# Allegro board ChipSee-AM3359.brd
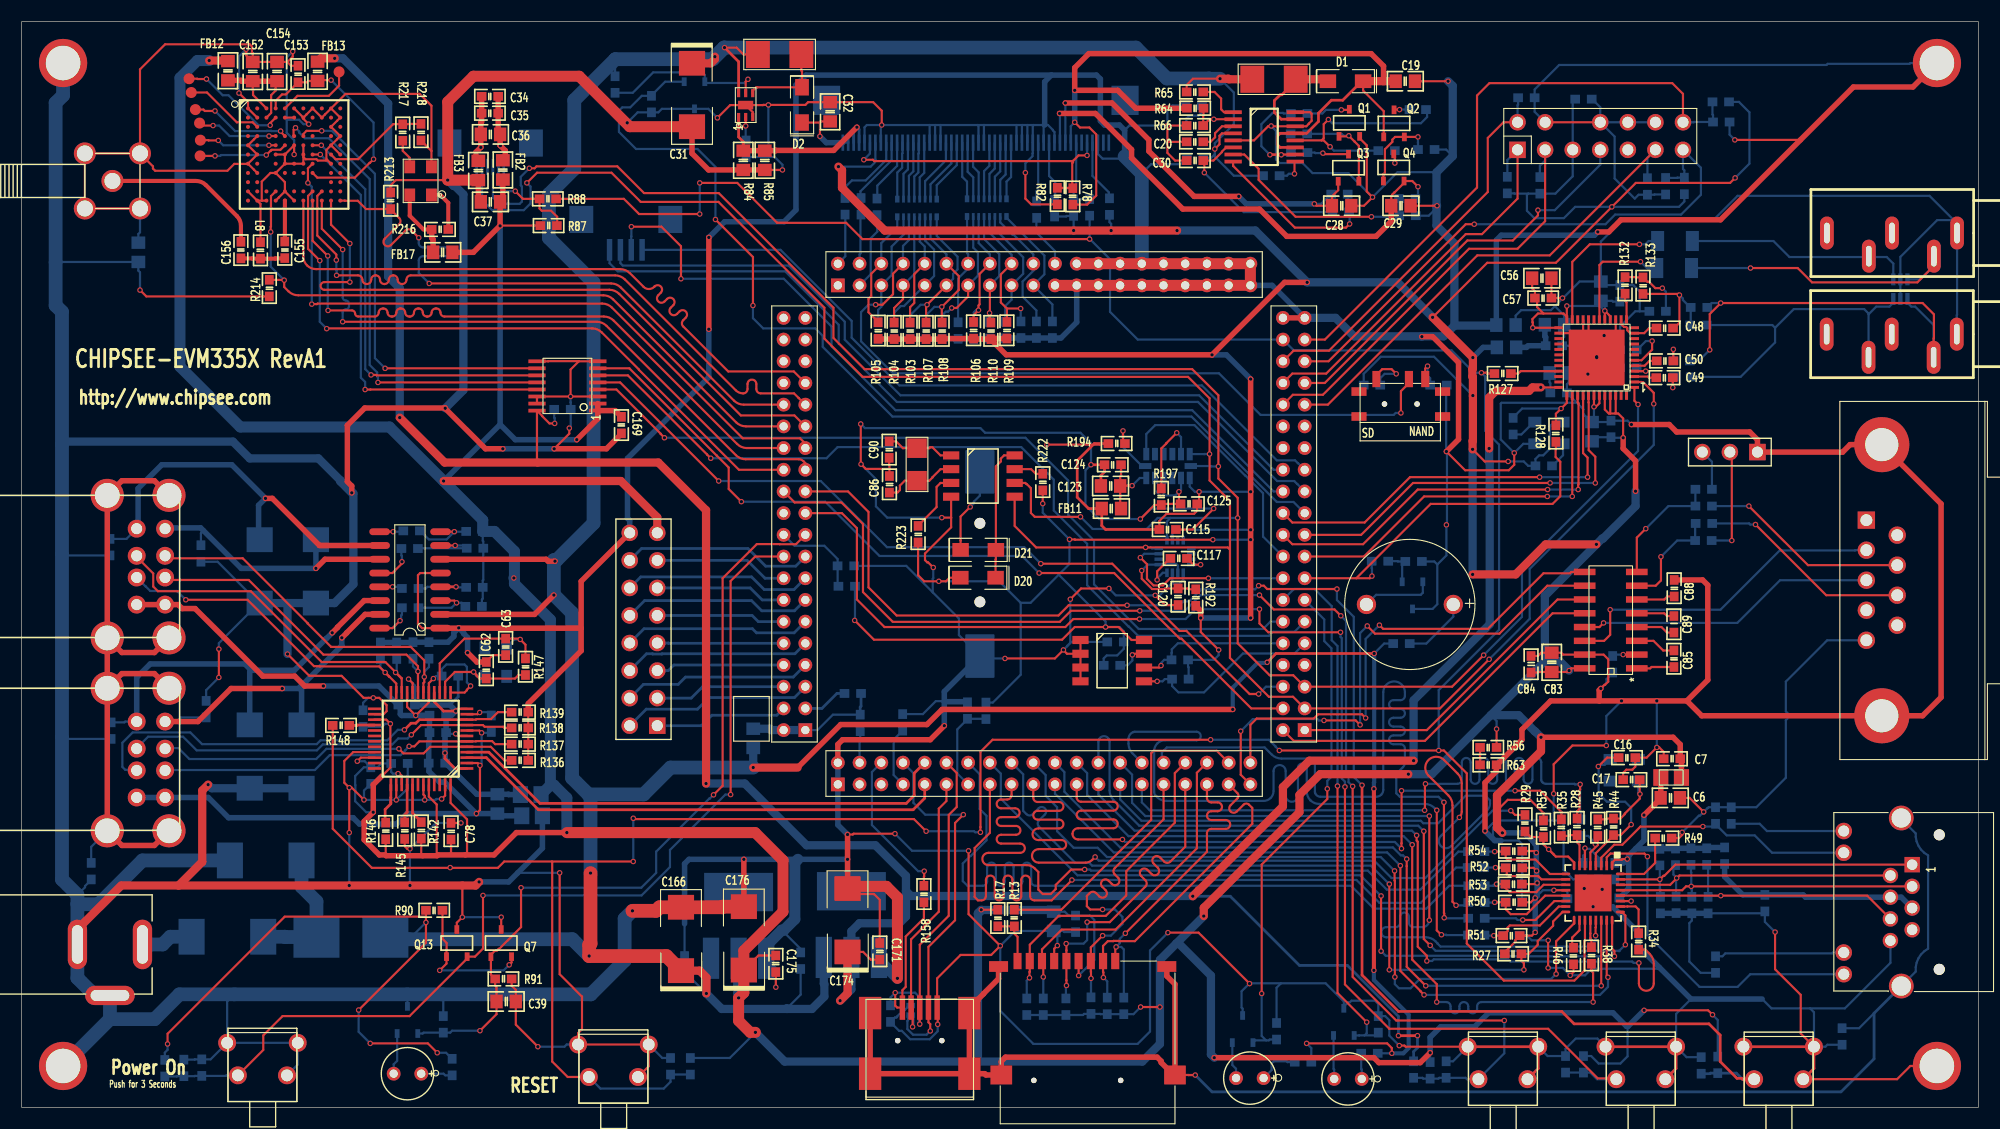
[diagram p0: board, top side]
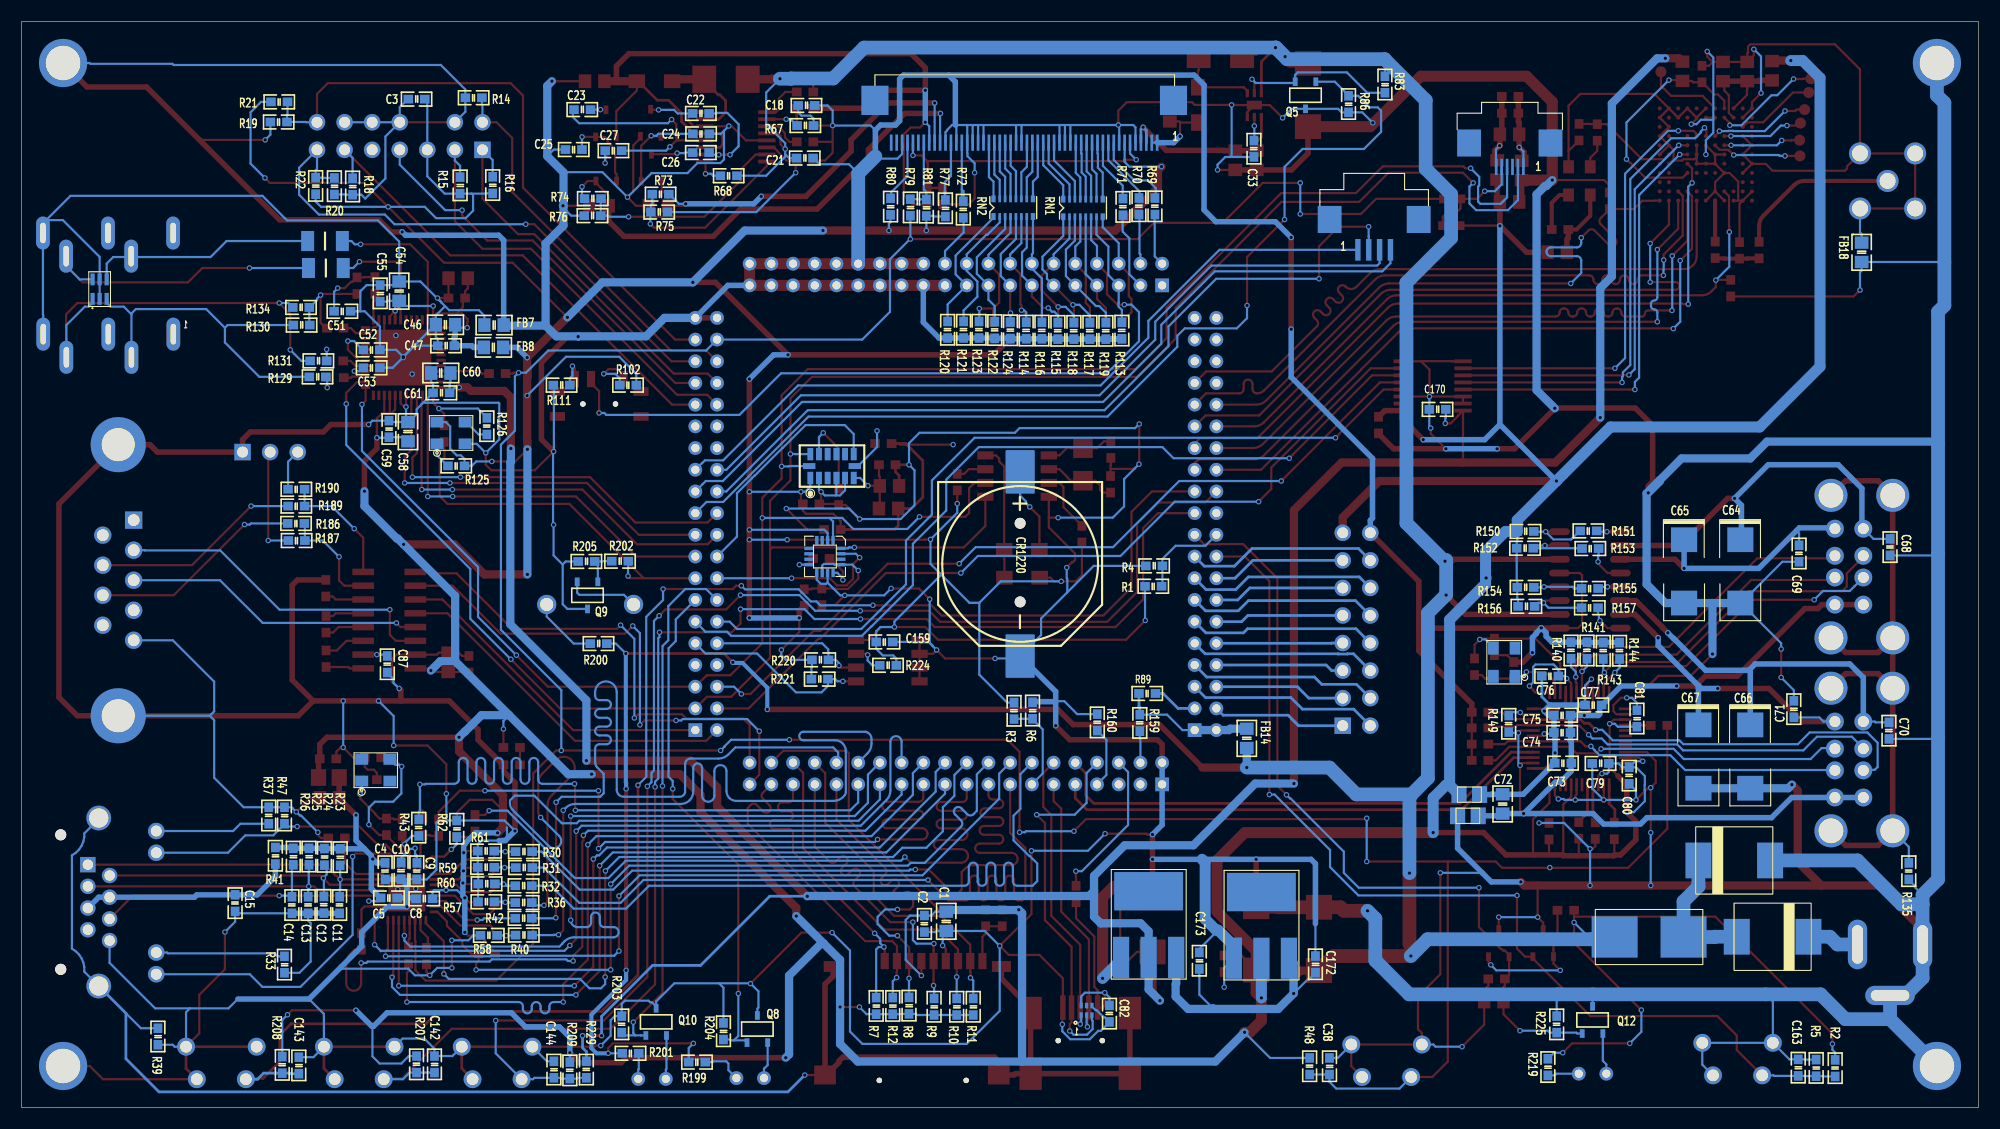
[diagram p1: board, bottom side, seen from below]

Outline 180.24 x 100.08 mm; copper layers: TOP, BOTTOM. Coordinates in mm from the lower left corner of the outline.
Outline path: 0,100.08 0,0 180.24,0 180.24,100.08 0,100.08

## Design rules (mm)
net group POWER: nets DGND VDD_3V3
net group CLK: nets LCD_DCLK
net group GMII1: nets GMII1_COL GMII1_CRS GMII1_MDIO_CLK GMII1_MDIO_DATA GMII1_REFCLK GMII1_RXCLK GMII1_RXD0 GMII1_RXD1 GMII1_RXD2 GMII1_RXD3 GMII1_RXDV GMII1_RXERR GMII1_TXCLK GMII1_TXD0 GMII1_TXD1 GMII1_TXD2 GMII1_TXD3 GMII1_TXEN
net group H_JTAG_POINT69: nets N12176376 TDI TDO TMS TRSTN
net group MG5_H_JTAG: nets TCK
net group MMC0: nets MMC0_CLK MMC0_CMD MMC0_D0 MMC0_D1 MMC0_D2 MMC0_D3 MMC0_SDCD
net group WIFI: nets GPMC_AD9 GPMC_AD10 GPMC_AD11 GPMC_AD12 GPMC_AD13 GPMC_AD14 GPMC_AD15 GPMC_CLK GPMC_CSN3

## Placement (name value [footprint] x y rotation side)
ANT1  SMA  [SMA-CHIPSEE]  10.9 87.93 180 top
BT1  CoinBattery3.1V  [BAT]  88.27 50.09 90 bottom
C1  10uF  [0805]  95.07 17.14 270 bottom
C2  0.1uF  [0603]  97.08 16.92 270 bottom
C3  1UF  [0603]  143.87 92.94 0 bottom
C4  0.1uF  [0603]  146.76 21.77 270 bottom
C5  0.1uF  [0603]  146.41 19.3 180 bottom
C6  10uF  [0805]  151.87 28.52 0 top
C7  0.1uF  [0603]  152.02 32.13 180 top
C8  0.1uF  [0603]  143.15 19.23 0 bottom
C9  2.2nF  [0603]  143.84 21.77 270 bottom
C10  1uF  [0603]  145.29 21.79 270 bottom
C11  18pF,DNI  [0603]  150.95 18.64 270 bottom
C12  18pF,DNI  [0603]  152.4 18.67 270 bottom
C13  18pF,DNI  [0603]  153.85 18.64 270 bottom
C14  18pF,DNI  [0603]  155.35 18.64 270 bottom
C15  0.1uF  [0603]  160.58 18.82 270 bottom
C16  30pF  [0603]  147.88 32.23 0 top
C17  30pF  [0603]  148.29 30.2 180 top
C18  0.1uF  [0603]  107.95 92.35 0 bottom
C19  10uF  [0805]  127.46 94.59 180 top
C20  2.2nF  [0603]  108.08 89 0 top
C21  0.1uF  [0603]  108.1 87.5 0 bottom
C22  0.1uF  [0603]  117.68 91.62 0 bottom
C23  0.1uF  [0603]  128.6 91.97 0 bottom
C24  0.47uF  [0603]  117.65 89.74 180 bottom
C25  0.47uF  [0603]  129.39 88.29 180 bottom
C26  0.22uF  [0603]  117.68 88.01 0 bottom
C27  0.22uF  [0603]  125.73 88.19 180 bottom
C28  10uF  [0805]  121.59 83.11 0 top
C29  10uF  [0805]  127.05 83.11 0 top
C30  0.22uF  [0603]  108.08 87.27 180 top
C31  100uF  [MC6032P]  61.75 93.32 270 top
C32  10uF  [0805]  74.47 91.77 90 top
C33  0.22uF  [0603]  66.73 88.37 270 bottom
C34  30pF  [0603]  43.13 93.19 0 top
C35  0.1uF  [0603]  43.13 91.64 0 top
C36  10uF  [0805]  43.18 89.69 180 top
C37  10uF  [0805]  43.18 83.46 180 top
C38  0.1uF  [0603]  59.77 3.78 90 bottom
C39  1uF  [0805]  44.63 9.75 0 top
C44  47uF  [C1206]  152.3 79.86 180 bottom
C45  47uF  [C1206]  152.22 77.37 180 bottom
C46  10uF  [0805]  141.2 72.14 0 bottom
C47  0.1uF  [0603]  141.15 70.21 0 bottom
C48  0.1uF  [0603]  151.36 71.83 0 top
C49  0.1uF  [0603]  151.33 67.26 0 top
C50  0.1uF  [0603]  151.38 68.81 0 top
C51  0.1uF  [0603]  150.7 73.38 180 bottom
C52  0.1uF  [0603]  148.01 69.82 180 bottom
C53  0.01uF  [0603]  148.01 68.17 180 bottom
C54  10uF  [0805]  145.47 75.23 90 bottom
C55  0.1uF  [0603]  147.22 75.03 90 bottom
C56  10uF  [0805]  140.03 76.43 0 top
C57  0.1uF  [0603]  140.16 74.6 0 top
C58  10uF  [0805]  144.65 62.28 90 bottom
C59  0.1uF  [0603]  146.41 62.53 90 bottom
C60  10uF  [0805]  141.63 67.69 0 bottom
C61  0.1uF  [0603]  141.58 65.86 0 bottom
C62  25pF  [0603]  42.8 40.28 270 top
C63  25pF  [0603]  44.58 42.44 90 top
C64  100uF  [MC6032P]  21.92 49.4 270 bottom
C65  100uF  [MC6032P]  27.1 49.4 270 bottom
C66  100uF  [MC6032P]  21.01 32.33 270 bottom
C67  100uF  [MC6032P]  25.78 32.33 270 bottom
C68  0.1uF  [0603]  8.13 51.64 270 bottom
C69  0.1uF  [0603]  16.51 51.05 270 bottom
C70  0.1uF  [0603]  8.23 34.72 270 bottom
C71  0.1uF  [0603]  16.99 36.7 90 bottom
C72  10uF  [0805]  43.81 27.97 270 bottom
C73  0.1uF  [0603]  38.25 31.72 180 bottom
C74  0.1uF  [0603]  38.33 34.54 180 bottom
C75  0.1uF  [0603]  38.33 36.14 180 bottom
C76  0.1uF  [0603]  39.45 39.75 180 bottom
C77  0.1uF  [0603]  35.46 37.08 180 bottom
C78  0.1uF  [0603]  39.55 25.45 90 top
C79  0.1uF  [0603]  34.8 31.7 0 bottom
C80  0.1uF  [0603]  32.16 30.58 270 bottom
C81  0.1uF  [0603]  31.45 35.84 90 bottom
C82  0.01uF  [0603]  80.04 8.64 270 bottom
C83  10uF  [0805]  140.94 41.02 90 top
C84  0.01uF  [0603]  139.04 40.84 90 top
C85  0.1uF  [0603]  152.2 41.35 90 top
C86  25pF  [0603]  79.93 57.43 90 top
C87  0.1uF  [0603]  146.56 40.84 270 bottom
C88  0.1uF  [0603]  152.22 47.85 90 top
C89  0.1uF  [0603]  152.2 44.53 90 top
C90  25pF  [0603]  79.91 60.63 90 top
C115  0.01uF  [0603]  105.56 53.26 0 top
C117  0.01uF  [0603]  106.58 50.6 180 top
C120  10uF  [0603]  106.53 47.07 270 top
C123  10uF  [0805]  100.3 57.28 0 top
C124  0.01uF  [0603]  100.51 59.23 0 top
C125  0.01uF  [0603]  107.52 55.63 180 top
C142  0.01uF  [0603]  142.21 3.96 90 bottom
C143  0.01uF  [0603]  154.71 3.86 90 bottom
C144  0.01uF  [0603]  131.22 3.48 90 bottom
C152  10uF  [0805]  21.29 95.48 90 top
C153  1uF  [0603]  25.45 95.25 90 top
C154  2.2uF  [0805]  23.52 95.48 90 top
C155  10pF  [0603]  24.23 79.04 90 top
C156  10pF  [0603]  20.19 79.02 270 top
C159  0.1uf,16V  [0603]  100.76 42.9 180 bottom
C163  0.1uF  [0603]  16.59 3.66 90 bottom
C166  100uF  [MC6032P]  60.73 15.52 90 top
C169  0.01uF  [0603]  55.24 62.89 270 top
C170  0.01uF  [0603]  49.81 64.34 0 bottom
C171  0.1uF  [0603]  79.04 14.38 90 top
C172  0.1uF  [0603]  61.06 13.18 90 bottom
C173  0.1uF  [0603]  71.76 13.51 90 bottom
C174  100uF  [MC6032P]  76.07 17.25 90 top
C175  0.1uF  [0603]  69.47 13.23 270 top
C176  100uF  [MC6032P]  66.52 15.57 90 top
D1  1N5819  [MD3216]  121.95 94.59 0 top
D2  1N5819  [MD3216]  71.88 92.41 270 top
D14  Green LED  [LED-DIP]  111.86 2.69 0 top
D15  Green LED  [LED-DIP]  120.9 2.62 0 top
D16  1N5819  [SMCJ15CA]  18.95 15.72 0 bottom
D17  -  [SMCJ15CA]  22.48 22.76 180 bottom
D18  Green LED  [LED-DIP]  34.26 3.1 0 top
D20  -  [MD3216]  88.09 48.82 0 top
D21  -  [MD3216]  88.11 51.38 0 top
F1  Fuse 4A  [SMDFUSEBLK]  30.33 15.7 0 bottom
FB1  FERRITE  [SM-7351-IND-0805]  151.94 30.4 180 top
FB2  FERRITE  [0805]  44.32 86.41 270 top
FB3  FERRITE  [0805]  42.06 86.36 270 top
FB7  FERRITE  [0805]  136.73 72.11 180 bottom
FB8  FERRITE  [0805]  136.78 70.05 0 bottom
FB9  FERRITE  [SM-7351-IND-0805]  46.89 28.83 180 bottom
FB10  FERRITE  [SM-7351-IND-0805]  47.02 26.87 180 bottom
FB11  FERRITE  [0805]  100.38 55.19 180 top
FB12  FERRITE  [0805]  19 95.55 270 top
FB13  FERRITE  [0805]  27.25 95.5 270 top
FB14  FERRITE  [0805]  67.39 34.01 90 bottom
FB17  FERRITE  [0805]  38.79 78.82 180 top
FB18  FERRITE  [0805]  10.74 78.82 90 bottom
L1  10uH,1A  [L22UH]  113.36 94.77 0 top
L2  10uH,1A  [L22UH]  67.82 97.05 0 top
L8  NL  [0603]  22 78.99 270 top
MTG1  MHOLE  [MOUNTHOLE_3MM_CHIPSEE]  3.81 96.27 0 top
MTG2  MHOLE  [MOUNTHOLE_3MM_CHIPSEE]  176.43 96.27 0 top
MTG3  MHOLE  [MOUNTHOLE_3MM_CHIPSEE]  176.43 3.81 0 top
MTG4  MHOLE  [MOUNTHOLE_3MM_CHIPSEE]  3.81 3.81 0 top
P1  CONN PLUG 20x2  [IDC2X20]  72.19 34.77 90 top
P2  CONN PLUG 20x2  [IDC2X20]  75.18 29.77 0 top
P3  CONN PLUG 20x2  [IDC2X20]  118.19 34.77 90 top
P4  CONN PLUG 20x2  [IDC2X20]  75.18 75.77 0 top
P5  SCHA5B0200  [SD-MICRO-CHIPSEE]  100.74 3.48 90 top
P6  HDR 2x7  [JUMP2X7-6040-K6]  137.8 88.27 90 top
P7  WE_7499010211A  [RJ45-CHIPSEE]  172.64 23.37 90 top
P8  AT070TN92  [FPC50]  105.64 88.93 180 bottom
P9  Res Touch(1mm)  [FPC4]  57.15 79.04 180 bottom
P11  Cap Touch  [FPC6]  44.91 86.69 180 bottom
P14  3.5mm SJ3524  [AUDIO-CHIPSEE-2]  178.28 80.59 0 top
P15  3.5mm SJ3524  [AUDIO-CHIPSEE-2]  178.26 71.27 0 top
P16  USB-A Conn.  [USB_STACKED2]  13.21 35.56 270 top
P17  USB-A Conn.  [USB_STACKED2]  13.21 53.34 270 top
P18  USB_MicroAB  [USB-MINI-SMT-CHIPSEE]  82.73 9.19 0 top
P19  RS232  [DB9M-CHIPSEE]  169.93 43.1 270 top
P20  RS232-3  [IDC_100MIL_1X3]  159.89 60.4 180 top
P23  CON16A  [IDC_100MIL_2X8]  58.55 35.18 90 top
P27  PJ-200A  [CONN3-PWR-CHIPSEE]  11.13 15.01 180 top
Q1  BAT54S  [SOT23-CHIPSEE]  122.3 90.75 90 top
Q2  BAT54S  [SOT23-CHIPSEE]  126.42 90.7 90 top
Q3  BAT54S  [SOT23-CHIPSEE]  122.22 86.61 90 top
Q4  BAT54S  [SOT23-CHIPSEE]  126.39 86.64 90 top
Q5  MOSFET N  [SOT23-CHIPSEE]  61.98 93.29 270 bottom
Q7  MOSFET N  [SOT23-CHIPSEE]  44.17 15.14 90 top
Q8  MOSFET N  [SOT23-CHIPSEE]  112.47 7.21 90 bottom
Q9  MOSFET N  [SOT23-CHIPSEE]  128.12 47.19 270 bottom
Q10  MOSFET N  [SOT23-CHIPSEE]  121.79 7.87 90 bottom
Q12  MOSFET N  [SOT23-CHIPSEE]  35.53 8.05 90 bottom
Q13  MOSFET N  [SOT23-CHIPSEE]  40.08 15.14 90 top
R1  10K,1%,DNI  [0603]  76 48.03 180 bottom
R2  10K,1%,DNI  [0603]  13.18 3.61 270 bottom
R3  10K,1%  [0603]  88.82 36.55 270 bottom
R4  0R  [0603]  75.92 49.91 0 bottom
R5  0R,1%,DNI  [0603]  14.94 3.63 90 bottom
R6  10K,1%,DNI  [0603]  87.12 36.58 90 bottom
R7  10K,1%  [0603]  101.52 9.35 90 bottom
R8  10K,1%  [0603]  98.5 9.37 90 bottom
R9  10K,1%  [0603]  96.19 9.27 90 bottom
R10  10K,1%  [0603]  94.11 9.27 90 bottom
R11  10K,1%  [0603]  92.58 9.27 90 bottom
R12  10K,1%  [0603]  100 9.35 90 bottom
R13  0R  [0603]  91.44 17.45 270 top
R14  10K,1%,DNI  [0603]  138.61 93.07 180 bottom
R15  10K,1%,DNI  [0603]  139.85 84.99 90 bottom
R16  10K,1%,DNI  [0603]  136.86 85.01 90 bottom
R17  10K,1%  [0603]  89.92 17.45 90 top
R18  10K,1%,DNI  [0603]  149.76 84.89 90 bottom
R19  10K,1%,DNI  [0603]  156.57 90.83 180 bottom
R20  10K,1%,DNI  [0603]  151.43 84.91 90 bottom
R21  10K,1%  [0603]  156.51 92.68 180 bottom
R22  10K,1%  [0603]  153.16 84.94 90 bottom
R23  49.9R,1%  [0603]  150.9 23.06 90 bottom
R24  49.9R,1%  [0603]  152.35 23.09 90 bottom
R25  49.9R,1%  [0603]  153.77 23.11 90 bottom
R26  49.9R,1%  [0603]  155.22 23.11 90 bottom
R27  1.5K,5%  [0603]  137.39 14.15 0 top
R28  0R,DNI  [0603]  143.28 25.86 270 top
R29  100R,1%  [0603]  138.48 26.19 270 top
R30  100R,1%  [0603]  133.98 23.57 0 bottom
R31  100R,1%  [0603]  133.96 22.1 0 bottom
R32  100R,1%  [0603]  134.01 20.42 0 bottom
R33  510R,1%  [0603]  156.03 13.16 90 bottom
R34  100R,1%  [0603]  148.95 15.29 90 top
R35  100R,1%  [0603]  141.83 25.78 270 top
R36  100R,1%  [0603]  134.01 18.87 0 bottom
R37  510R,1%  [0603]  157.48 26.9 270 bottom
R38  100R,1%  [0603]  144.6 14 90 top
R39  0R  [0603]  167.69 6.53 90 bottom
R40  100R,1%  [0603]  133.98 15.88 0 bottom
R41  0R  [0603]  156.87 23.19 90 bottom
R42  100R,1%  [0603]  134.01 17.42 0 bottom
R43  0R,DNI  [0603]  143.66 25.78 270 bottom
R44  1M  [0603]  146.63 25.86 90 top
R45  0R  [0603]  145.19 25.78 270 top
R46  10K,1%  [0603]  142.95 13.94 270 top
R47  10K,1%  [0603]  156.03 26.9 90 bottom
R48  10K,1%,DNI  [0603]  61.59 3.78 270 bottom
R49  12.1K,1%  [0603]  151.23 24.82 0 top
R50  10K,1%,DNI  [0603]  137.46 18.9 180 top
R51  10K,1%  [0603]  137.24 15.82 0 top
R52  10K,1%  [0603]  137.46 22.07 0 top
R53  10K,1%  [0603]  137.44 20.57 0 top
R54  10K,1%,DNI  [0603]  137.46 23.62 0 top
R55  10K,1%,DNI  [0603]  140.18 25.68 90 top
R56  10K,1%,DNI  [0603]  135.1 33.17 0 top
R57  10K,1%  [0603]  137.44 18.95 0 bottom
R58  10K,1%,DNI  [0603]  137.21 15.85 0 bottom
R59  10K,1%,DNI  [0603]  137.46 22.12 0 bottom
R60  10K,1%,DNI  [0603]  137.41 20.6 0 bottom
R61  10K,1%  [0603]  137.46 23.62 0 bottom
R62  10K,1%  [0603]  140.16 25.68 90 bottom
R63  10K,1%  [0603]  135.1 31.57 0 top
R64  4.99K,1%  [0603]  108.1 92.1 0 top
R65  100K,1%  [0603]  108.08 93.6 0 top
R66  680R,1%  [0603]  108.08 90.5 0 top
R67  10K,1%  [0603]  108.05 90.5 0 bottom
R68  10K,1%  [0603]  115.11 85.88 180 bottom
R69  22R,1%  [0603]  75.84 83.06 270 bottom
R70  22R,1%  [0603]  77.32 83.06 270 bottom
R71  22R,1%  [0603]  78.79 83.01 270 bottom
R72  22R,1%  [0603]  93.5 82.75 270 bottom
R73  5.6K,1%  [0603]  121.39 84.18 180 bottom
R74  24K,1%  [0603]  127.64 83.77 0 bottom
R75  1K,1%  [0603]  121.51 82.52 0 bottom
R76  2K,1%  [0603]  127.66 82.19 0 bottom
R77  5.6K,1%  [0603]  95.15 82.88 90 bottom
R78  24K,1%  [0603]  96.82 83.97 270 top
R79  0R,DNI  [0603]  98.37 82.96 90 bottom
R80  5.6K,1%  [0603]  100.2 83.03 90 bottom
R81  5.6K,1%  [0603]  96.9 82.93 90 bottom
R82  15K,1%  [0603]  95.4 84 90 top
R83  5.6K,1%  [0603]  54.66 94.28 90 bottom
R84  2.2R,1%  [0805]  66.47 87.3 270 top
R85  2.2R,1%  [0805]  68.45 87.3 270 top
R86  5.6K,1%  [0603]  58.01 92.48 90 bottom
R87  5.6K,1%  [0603]  48.54 81.28 180 top
R88  0R  [0603]  48.46 83.74 180 top
R89  0R  [0603]  76.56 38.15 180 bottom
R90  10K,1%,DNI  [0603]  38 18.16 0 top
R91  100K,1%  [0603]  44.37 11.84 180 top
R102  100K,1%  [0603]  124.38 66.57 180 bottom
R103  100K,1%  [0603]  81.84 71.58 90 top
R104  100K,1%  [0603]  80.37 71.58 90 top
R105  100K,1%  [0603]  78.89 71.6 90 top
R106  100K,1%,DNI  [0603]  87.68 71.63 90 top
R107  100K,1%,DNI  [0603]  83.31 71.58 90 top
R108  100K,1%,DNI  [0603]  84.79 71.58 90 top
R109  100K,1%  [0603]  90.75 71.63 90 top
R110  100K,1%,DNI  [0603]  89.28 71.58 90 top
R111  100K,1%  [0603]  130.51 66.57 0 bottom
R113  100K,1%  [0603]  78.89 71.6 270 bottom
R114  100K,1%  [0603]  87.71 71.6 270 bottom
R115  100K,1%  [0603]  84.79 71.58 270 bottom
R116  100K,1%  [0603]  86.26 71.6 270 bottom
R117  100K,1%  [0603]  81.84 71.58 270 bottom
R118  100K,1%  [0603]  83.31 71.58 270 bottom
R119  100K,1%  [0603]  80.37 71.58 270 bottom
R120  100K,1%  [0603]  94.95 71.68 270 bottom
R121  100K,1%  [0603]  93.47 71.68 270 bottom
R122  100K,1%  [0603]  90.6 71.65 270 bottom
R123  100K,1%,DNI  [0603]  92.05 71.68 270 bottom
R124  100K,1%  [0603]  89.15 71.63 270 bottom
R125  0R,DNI  [0603]  140.21 59.13 180 bottom
R126  0R  [0603]  137.39 62.79 270 bottom
R127  0R  [0603]  136.42 67.64 180 top
R128  0R,DNI  [0603]  141.33 62.1 270 top
R129  0R,DNI  [0603]  152.98 67.34 0 bottom
R130  0R  [0603]  154.46 72.11 0 bottom
R131  0R,DNI  [0603]  152.91 68.81 0 bottom
R132  2.2K  [0603]  147.7 75.77 270 top
R133  330R  [0603]  149.35 75.74 90 top
R134  0R  [0603]  154.51 73.74 0 bottom
R135  0R  [0603]  6.4 21.77 270 bottom
R136  15K,1%  [0603]  45.9 31.98 180 top
R137  15K,1%  [0603]  45.9 33.48 180 top
R138  15K,1%  [0603]  45.9 34.98 180 top
R139  15K,1%  [0603]  45.9 36.42 180 top
R140  15K,1%  [0603]  37.52 42.11 270 bottom
R141  15K,1%  [0603]  36.04 42.11 270 bottom
R142  10K,1%  [0603]  36.8 25.53 90 top
R143  15K,1%  [0603]  34.54 42.09 270 bottom
R144  15K,1%  [0603]  33.05 42.09 270 bottom
R145  10K,1%  [0603]  35.28 25.5 90 top
R146  10K,1%  [0603]  33.53 25.48 90 top
R147  1M  [0603]  46.41 40.61 90 top
R148  0R  [0603]  29.41 35.2 180 top
R149  680R,1%  [0603]  43.26 35.36 270 bottom
R150  15K,1%  [0603]  41.71 53.09 0 bottom
R151  0R  [0603]  35.92 53.14 180 bottom
R152  15K,1%  [0603]  41.76 51.54 0 bottom
R153  0R  [0603]  35.74 51.51 180 bottom
R154  15K,1%  [0603]  41.71 47.93 0 bottom
R155  0R  [0603]  35.79 47.83 180 bottom
R156  15K,1%  [0603]  41.63 46.18 0 bottom
R157  0R  [0603]  35.79 46.05 180 bottom
R158  0R  [0603]  83.11 19.66 90 top
R159  0R  [0603]  77.24 35.43 270 bottom
R160  15K,1%  [0603]  81.15 35.48 270 bottom
R186  0R,DNI  [0603]  154.97 53.82 180 bottom
R187  0R  [0603]  154.91 52.25 180 bottom
R189  0R,DNI  [0603]  154.94 55.42 180 bottom
R190  0R  [0603]  154.94 56.97 180 bottom
R192  0R,DNI  [0603]  108.15 46.99 90 top
R194  10K,1%  [0603]  100.86 61.19 180 top
R197  10K,1%  [0603]  104.98 56.29 270 top
R199  510R,1%  [0603]  118.03 4.17 180 bottom
R200  510R,1%  [0603]  127.1 42.75 0 bottom
R201  510R,1%  [0603]  124.16 4.98 180 bottom
R202  0R  [0603]  125.12 50.34 0 bottom
R203  510R,1%  [0603]  124.97 7.65 270 bottom
R204  100K,1%  [0603]  115.6 7.01 90 bottom
R205  100K,1%  [0603]  128.22 50.32 0 bottom
R207  100K,1%  [0603]  143.87 3.96 270 bottom
R208  100K,1%  [0603]  156.24 3.91 270 bottom
R209  100K,1%,DNI  [0603]  129.74 3.4 270 bottom
R213  3.3K,1%  [0603]  33.99 83.57 270 top
R214  3.3K,1%  [0603]  22.81 75.51 90 top
R216  0R  [0603]  38.53 80.92 180 top
R217  10K,1%  [0603]  35.1 89.87 270 top
R218  12K,1%  [0603]  36.78 89.89 90 top
R219  510R,1%  [0603]  39.65 3.71 90 bottom
R220  10K  [0603]  106.68 41.25 0 bottom
R221  10K  [0603]  106.73 39.47 0 bottom
R222  10K,1%  [0603]  94.06 57.63 90 top
R223  10K,1%  [0603]  82.58 52.83 90 top
R224  10K,1%,DNI  [0603]  100.43 40.74 0 bottom
R225  100K,1%  [0603]  38.84 7.65 270 bottom
R229  100K,1%,DNI  [0603]  128.22 3.48 270 bottom
RN1  22R,8*0402  [RPAK16-10X25-2HV]  82.47 82.91 180 bottom
RN2  22R,8*0402  [RPAK16-10X25-2HV]  88.9 82.93 180 bottom
SW1  SW KEY-SPDT  [SWITCH-CHIPSEE]  124.79 67.13 0 top
SW2  B3SL  [SW4-PUSH-CHIPSEE]  152.4 5.59 180 top
SW3  B3SL  [SW4-PUSH-CHIPSEE]  165.1 5.59 180 top
SW4  B3SL  [SW4-PUSH-CHIPSEE]  139.7 5.59 180 top
SW5  B3SL  [SW4-PUSH-CHIPSEE]  25.43 5.94 180 top
SW6  B3SL  [SW4-PUSH-CHIPSEE]  57.76 5.79 180 top
TP3  -  [TP_SMD1MMCIRCLE]  15.62 93.55 0 top
TP4  -  [TP_SMD1MMCIRCLE]  16.38 90.73 0 top
TP5  -  [TP_SMD1MMCIRCLE]  16.46 89.15 0 top
TP6  -  [TP_SMD1MMCIRCLE]  16 91.97 0 top
TP7  -  [TP_SMD1MMCIRCLE]  16.43 87.71 0 top
TP8  -  [TP_SMD1MMCIRCLE]  29.24 95.45 0 top
TP9  -  [TP_SMD1MMCIRCLE]  15.42 94.82 0 top
U1  LAN8710A  [QFN32_5X5MM_EP3P3MM]  144.75 19.76 180 top
U2  -  [AAT1118]  114.45 89.46 0 top
U3  -  [TPS61165]  66.04 91.29 90 top
U5  TLV320AIC3106  [VQFN48_RGZ]  145.08 69.11 180 top
U6  SMF05CT1G  [SC70-6]  173.71 74.52 180 bottom
U7  -  [GL850A]  36.75 33.99 180 top
U8  TPS2054BD  [SO16-25X75]  35.76 48.62 90 top
U9  TPD4S012  [U_6_DRY]  82.14 8.94 180 bottom
U10  MAX3232E  [U_16_D]  146.38 44.91 90 top
U11  CAT24C256W  [SOP8]  100.46 41.17 0 top
U16  SN74AVC4T245  [U_16_PW]  50.27 66.5 90 top
U17  -  [HMC5883]  106.25 50.77 270 bottom
U19  -  [ADXL345]  107.59 58.01 90 bottom
U21  BEEF  [BUZZER-CHIPSEE]  131.88 46.35 180 top
U25  WG7310-00  [WG7310_00]  25.1 87.83 0 top
U29  AMS1117-1.8  [AMS1117]  78.97 13.82 180 bottom
U30  AMS1117-3.3  [AMS1117]  68.58 13.74 180 bottom
U31  PCF8563  [SOP8]  88.54 58.19 0 top
Y1  25MHz  [CRYSTAL3225]  148.92 30.07 180 bottom
Y2  12MHz,ACTIVE  [CRYSTAL3225]  141.99 61.16 180 bottom
Y3  12MHz  [CRYSTAL3225]  42.67 39.73 90 bottom
Y4  32.768KHz,ACTIVE  [CRYSTAL3225]  37.74 84.1 90 top
Y5  32.768KHz  [Y3512]  82.47 57.76 90 top

## Library data of the parts
ANT1 = SMA
BT1 = Battery_coin3V: Tolerance: RichardLC; User Part Number: pn
C1 = CAP_10uF_Y5V_10V_10%_0805
C2 C4 C5 C7 C8 C18-C30 C32-C37 C159 C171-C173 C175 = CAP_0.1uF_X7R_16V_10% 0402
C3 C38 C39 = 111-1002271_0: tolerance: 10%
C6 = CAP_4.7uF_X5R_6.3V_10%_0603
C9 = 470pF/5%/50V/C0G/0603_0
C10 = CAP_1.0UF_X5R_10V_10%_0402
C11-C14 C62 C63 = CAP_0402_100pF_COG_50V
C15 C68-C81 = CAP_0402_0.1uf_X5R_10V
C16 C17 = CAP_30PF_COG_50V_5%_0402
C31 C174 C176 = CAPACITOR POL
C44 C45 = 47uFCapacitor16V20%1206
C46 C54 C56 C58 C60 C83 C120 = 10uFCapacitor16V10%0805
C47 C49 C50 C55 C57 C59 C61 C85 C87-C89 C163 = 0.1uFCapacitor16V10%0402
C48 C51-C53 C82 C84 C115 C117 C123-C125 C142-C144 C169 C170 = 0.01uFCapacitor16V10%0402
C64-C67 = CAP_293D_120UF_6.3V: tolerance: 10%
C86 C90 = 25pFCapacitor100V5%0603
C152-C156 = CAPACITOR NON-POL
C166 = 100uFCapacitor16V20%ElectroPoly
D1 D2 D16 D20 D21 = DIODE
D14 D15 = LED_LTST-C150GKT
D17 = Diode_SMCJ15CA
D18 = LED_Green
F1 = Fuse_4A
FB1-FB3 = FER_180_200_0
FB7-FB11 = FerBead_180ohm200mA
FB12-FB14 FB17 FB18 = FER_MMZ1608R301A
L1 L2 = INDUCTOR
L8 = INDUCTOR_3
MTG1-MTG4 = MHOLE
P1-P4 = CONN PLUG 20x2_0
P5 = microSD_CONN_0
P6 = HDR_2x7_.1x.1: User Part Number: X; Tolerance: X
P7 = CONN_RJ45_MAG_WE_0
P8 = AT070TN92
P9 = 4 HEADER
P11 = CON6
P14 P15 = Conn_1.5mm_SJ3524SMT
P16 P17 = CONN_54819-0578_8: User Part Number: PART#; Tolerance: TOL
P18 = Conn_MicroUSBAB_0
P19 = Conn_DSUB9M_TH
P20 = CON3
P23 = CON16A
P27 = Power_Jack: Tolerance: X; User Part Number: X
Q1-Q4 = BAT54S
Q5 Q7-Q10 Q12 Q13 = MOSFET N
R1-R12 R17 R41 R48 R89-R91 R135-R160 R186 R187 R189 R190 = RES_10K_1/16W_1%_0402
R13 R43 R45 R224 = RES_0_1/16W_1%_0402
R14-R16 R18-R22 = 0402_10k_1: tolerance: 1%
R23-R26 = RES_4.7K_0402
R27 = RES_1.5K_1/16W_5%_0402
R28-R30 R34 R38 R40 = 100-1/10W-1%-0603_4
R31 R32 R35 R36 R42 = RES_100_1/10W_5%_0402
R33 R37 R199-R203 = RES_470_1/10W_5%_0402
R39 = RES_0.1_0805
R44 = RES_1M_1/16W_1%_0402
R46 R47 R49 = RES_12.1K_1/16W_1%_0402
R50-R63 = RES_4.75K_1/16W_1%_0402
R64-R88 R213 R214 R216-R218 = RES_2.2K_1/16W_1%_0402
R102-R111 R113-R124 R204 R205 = RES_100K_1/16W_1%_0402
R125-R134 = ZeroOhmResistor1/16W0402
R192 R194 R197 R222 R223 R225 = 10KOhmResistor1/16W0402
R207-R209 R229 = RES_100K_0402
R219-R221 = 150ohm1/16W1%SMD0402
RN1 RN2 = R-PACK_3
SW1 = SW KEY-SPDT_1
SW2-SW6 = Switch_Pushbuttonsmd: User Part Number: X; Tolerance: X
TP3-TP9 = Testpoint_SMD1mmCircle
U1 = LAN8710 QFN32_1
U2 = AAT1118
U3 = TPS61165
U5 = TLV320AIC3106
U6 = SMF05CT1G
U7 = GL850A
U8 = TPS2054BD: User Part Number: X; Tolerance: X
U9 = TPD4S012
U10 = MAX3232E
U11 = CAT24C256W
U16 = SN74AVC4T245
U17 = HMC5883
U19 = ADXL345
U21 = BEEF
U25 = DFCM-MGC31_0: Tolerance: RichardLC; User Part Number: pn
U29 U30 = AMS1117
U31 = PCF8563
Y1 Y3 = Crystal24MHzSCC
Y2 Y4 = Oscillator_12MHz
Y5 = CRYSTAL13_1

## Footprints (pads in the part's own frame, mm; a bottom-side part is the same pattern mirrored in y, then rotated)
0603
  rect 0.889x0.813 smd: 1(-0.762,0) 2(0.762,0)
0805
  rect 1.143x1.27 smd: 1(-0.889,0) 2(0.889,0)
AAT1118
  rect 1.6x0.35 smd: 1(-2.858,2.275) 2(-2.858,1.625) 3(-2.858,0.975) 4(-2.858,0.325) 5(-2.858,-0.325) 6(-2.858,-0.975) 7(-2.858,-1.625) 8(-2.858,-2.275) 9(2.858,-2.275) 10(2.858,-1.625) 11(2.858,-0.975) 12(2.858,-0.325) 13(2.858,0.325) 14(2.858,0.975) 15(2.858,1.625) 16(2.858,2.275)
ADXL345
  rect 1.145x0.55 smd: 1(0,0) 2(0,-0.8) 3(0,-1.6) 4(0,-2.4) 5(0,-3.2) 6(0,-4) 8(2.2,-4) 9(2.2,-3.2) 10(2.2,-2.4) 11(2.2,-1.6) 12(2.2,-0.8) 13(2.2,0)
  rect 0.55x1.145 smd: 7(1.1,-4.1) 14(1.1,0.1)
AMS1117
  rect 6.35x3.54 smd: (2.54,6.1)
  rect 1.5x3.8 smd: 1(0,0) 2(2.54,0) 3(5.08,0)
AUDIO-CHIPSEE-2
  oval 1.27x3.048 hole 0.508x1.905: 1(0,0) 2(-2.134,-2.134) 3(-5.994,0) 4(-8.128,-2.134) 5(-11.989,0)
BAT
  round 1 hole 1.1 unplated: (-3.5,0)
  round 1 hole 1.6 unplated: (3.749,0)
  custom 4.02x2.7 smd: 1(8.49,0) 2(-8.49,0)
BUZZER-CHIPSEE
  round 1.778 hole 1.219: 1(0,0) 2(8.001,0)
C1206
  rect 1.199x1.849 smd: 1(1.6,0) 2(-1.6,0)
CONN3-PWR-CHIPSEE
  oval 1.778x4.572 hole 1.016x3.556: 1(0,0) 2(5.994,0)
  oval 4.572x1.778 hole 3.556x1.016: 3(2.997,4.699)
CRYSTAL3225
  rect 1.2x1 smd: 1(0,0) 2(2.6,0) 3(2.6,2) 4(0,2)
DB9M-CHIPSEE
  rect 1.6x1.6 hole 1.092: 1(-11.024,0)
  round 1.6 hole 1.092: 2(-8.255,0) 3(-5.486,0) 4(-2.718,0) 5(0.051,0) 6(-9.639,2.845) 7(-6.871,2.845) 8(-4.102,2.845) 9(-1.333,2.845)
  round 5.08 hole 3.048: 10(-17.983,1.422) 11(7.01,1.422)
FPC4
  rect 2.2x2.5 smd: (-2.6,2.8) (5.6,2.8)
  rect 0.5x2 smd: 1(0,0) 2(1,0) 3(2,0) 4(3,0)
FPC6
  rect 2.2x2.5 smd: (-2,2.2) (5.5,2.2)
  rect 0.25x1.5 smd: 1(0.5,0) 2(1,0) 3(1.5,0) 4(2,0) 5(2.5,0) 6(3,0)
FPC50
  rect 2.5x2.7 smd: (4,3.9) (31.5,3.9)
  rect 0.25x1.5 smd: 1(30,0) 2(29.5,0) 3(29,0) 4(28.5,0) 5(28,0) 6(27.5,0) 7(27,0) 8(26.5,0) 9(26,0) 10(25.5,0) 11(25,0) 12(24.5,0) 13(24,0) 14(23.5,0) 15(23,0) 16(22.5,0) 17(22,0) 18(21.5,0) 19(21,0) 20(20.5,0) 21(20,0) 22(19.5,0) 23(19,0) 24(18.5,0) 25(18,0) 26(17.5,0) 27(17,0) 28(16.5,0) 29(16,0) 30(15.5,0) 31(15,0) 32(14.5,0) 33(14,0) 34(13.5,0) 35(13,0) 36(12.5,0) 37(12,0) 38(11.5,0) 39(11,0) 40(10.5,0) 41(10,0) 42(9.5,0) 43(9,0) 44(8.5,0) 45(8,0) 46(7.5,0) 47(7,0) 48(6.5,0) 49(6,0) 50(5.5,0)
GL850A
  rect 1.2x0.25 smd: 1(-4.25,2.75) 2(-4.25,2.25) 3(-4.25,1.75) 4(-4.25,1.25) 5(-4.25,0.75) 6(-4.25,0.25) 7(-4.25,-0.25) 8(-4.25,-0.75) 9(-4.25,-1.25) 10(-4.25,-1.75) 11(-4.25,-2.25) 12(-4.25,-2.75) 25(4.25,-2.75) 26(4.25,-2.25) 27(4.25,-1.75) 28(4.25,-1.25) 29(4.25,-0.75) 30(4.25,-0.25) 31(4.25,0.25) 32(4.25,0.75) 33(4.25,1.25) 34(4.25,1.75) 35(4.25,2.25) 36(4.25,2.75)
  rect 0.25x1.2 smd: 13(-2.75,-4.25) 14(-2.25,-4.25) 15(-1.75,-4.25) 16(-1.25,-4.25) 17(-0.75,-4.25) 18(-0.25,-4.25) 19(0.25,-4.25) 20(0.75,-4.25) 21(1.25,-4.25) 22(1.75,-4.25) 23(2.25,-4.25) 24(2.75,-4.25) 37(2.75,4.25) 38(2.25,4.25) 39(1.75,4.25) 40(1.25,4.25) 41(0.75,4.25) 42(0.25,4.25) 43(-0.25,4.25) 44(-0.75,4.25) 45(-1.25,4.25) 46(-1.75,4.25) 47(-2.25,4.25) 48(-2.75,4.25)
HMC5883
  rect 0.8x0.32 smd: 1(-1.5,0.75) 2(-1.5,0.25) 3(-1.5,-0.25) 4(-1.5,-0.75) 9(1.5,-0.75) 10(1.5,-0.25) 11(1.5,0.25) 12(1.5,0.75)
  rect 0.32x0.8 smd: 5(-0.75,-1.5) 6(-0.25,-1.5) 7(0.25,-1.5) 8(0.75,-1.5) 13(0.75,1.5) 14(0.25,1.5) 15(-0.25,1.5) 16(-0.75,1.5)
IDC2X20
  rect 1.27x1.27 hole 0.762: 1(0,0)
  round 1.27 hole 0.762: 2(0,2) 3(2,0) 4(2,2) 5(4,0) 6(4,2) 7(6,0) 8(6,2) 9(8,0) 10(8,2) 11(10,0) 12(10,2) 13(12,0) 14(12,2) 15(14,0) 16(14,2) 17(16,0) 18(16,2) 19(18,0) 20(18,2) 21(20,0) 22(20,2) 23(22,0) 24(22,2) 25(24,0) 26(24,2) 27(26,0) 28(26,2) 29(28,0) 30(28,2) 31(30,0) 32(30,2) 33(32,0) 34(32,2) 35(34,0) 36(34,2) 37(36,0) 38(36,2) 39(38,0) 40(38,2)
IDC_100MIL_1X3
  rect 1.524x1.524 hole 1.016: 1(0,0)
  round 1.524 hole 1.016: 2(2.54,0) 3(5.08,0)
IDC_100MIL_2X8
  rect 1.524x1.524 hole 1.016: 1(0,0)
  round 1.524 hole 1.016: 2(0,2.54) 3(2.54,0) 4(2.54,2.54) 5(5.08,0) 6(5.08,2.54) 7(7.62,0) 8(7.62,2.54) 9(10.16,0) 10(10.16,2.54) 11(12.7,0) 12(12.7,2.54) 13(15.24,0) 14(15.24,2.54) 15(17.78,0) 16(17.78,2.54)
JUMP2X7-6040-K6
  rect 1.524x1.524 hole 1.016: 1(0,0)
  round 1.524 hole 1.016: 2(2.54,0) 3(0,-2.54) 4(2.54,-2.54) 5(0,-5.08) 7(0,-7.62) 8(2.54,-7.62) 9(0,-10.16) 10(2.54,-10.16) 11(0,-12.7) 12(2.54,-12.7) 13(0,-15.24) 14(2.54,-15.24)
L22UH
  rect 2.2x2.5 smd: 1(0,0) 2(4,0)
LED-DIP
  round 1.27 hole 0.762: 1(0,0) 2(2.54,0)
MC6032P
  rect 2.286x2.413 smd: 1(-2.921,0) 2(2.921,0)
MD3216
  rect 1.524x1.27 smd: 1(-1.625,0) 2(1.625,0)
MOUNTHOLE_3MM_CHIPSEE
  round 4.445 hole 3.175: 1(0,0)
QFN32_5X5MM_EP3P3MM
  oval 0.254x0.838 smd: 1(-1.751,-2.515) 8(1.751,-2.515) 17(1.751,2.515) 24(-1.751,2.515)
  rect 0.254x0.838 smd: 2(-1.251,-2.515) 3(-0.751,-2.515) 4(-0.25,-2.515) 5(0.25,-2.515) 6(0.751,-2.515) 7(1.251,-2.515) 18(1.251,2.515) 19(0.751,2.515) 20(0.25,2.515) 21(-0.25,2.515) 22(-0.751,2.515) 23(-1.251,2.515)
  oval 0.838x0.254 smd: 9(2.515,-1.751) 16(2.515,1.751) 25(-2.515,1.751) 32(-2.515,-1.751)
  rect 0.838x0.254 smd: 10(2.515,-1.251) 11(2.515,-0.751) 12(2.515,-0.25) 13(2.515,0.25) 14(2.515,0.751) 15(2.515,1.251) 26(-2.515,1.251) 27(-2.515,0.751) 28(-2.515,0.25) 29(-2.515,-0.25) 30(-2.515,-0.751) 31(-2.515,-1.251)
  rect 3.404x3.404 smd: 33(0,0)
RJ45-CHIPSEE
  round 1.016 hole 3.251 unplated: (-10.65,-4) (1.75,-4)
  rect 1.422x1.422 hole 0.965: 1(-1,-1.5)
  round 1.422 hole 0.965: 2(-2,0.5) 3(-3,-1.5) 4(-4,0.5) 5(-5,-1.5) 6(-6,0.5) 7(-7,-1.5) 8(-8,0.5)
  round 1.524 hole 1.016: 9(2.1,4.8) 10(0.1,4.8) 11(-9.1,4.8) 12(-11.1,4.8)
  round 2.286 hole 1.778: 13(-12.19,-0.5) 14(3.3,-0.5)
RPAK16-10X25-2HV
  rect 0.406x0.635 smd: 1(-1.819,-0.813) 8(1.819,-0.813) 9(1.819,0.813) 16(-1.819,0.813)
  rect 0.254x0.635 smd: 2(-1.245,-0.813) 3(-0.747,-0.813) 4(-0.249,-0.813) 5(0.249,-0.813) 6(0.747,-0.813) 7(1.245,-0.813) 10(1.245,0.813) 11(0.747,0.813) 12(0.249,0.813) 13(-0.249,0.813) 14(-0.747,0.813) 15(-1.245,0.813)
SC70-6
  rect 0.4x1.1 smd: 1(0,0) 2(0.65,0) 3(1.3,0) 4(1.3,1.8) 5(0.65,1.8) 6(0,1.8)
SD-MICRO-CHIPSEE
  round 0.5 hole 1.2 unplated: (-1,7.5) (-1,-0.5)
  rect 1.5x0.75 smd: 1(10,0) 2(10,1.125) 3(10,2.25) 4(10,3.375) 5(10,4.5) 6(10,5.625) 7(10,6.75) 8(10,7.875) 9(10,9)
  rect 1x1.75 smd: 10(9.5,-4.75) 11(9.5,10.75)
  rect 1.75x2 smd: 12(-0.5,-5.5) 13(-0.5,10.5)
SM-7351-IND-0805
  rect 1.397x1.549 smd: 1(-0.95,0) 2(0.95,0)
SMA-CHIPSEE
  round 2.032 hole 1.473: 1(0,0) 2(5.08,0) 3(5.08,5.08) 4(0,5.08) 5(2.54,2.54)
SMCJ15CA
  rect 2.4x3.299 smd: 1(-3.3,0) 2(3.3,0)
SMDFUSEBLK
  rect 4.242x3.81 smd: 1(-3.175,0) 2(3.175,0)
SO16-25X75
  oval 0.635x1.905 smd: 1(-4.445,-2.819) 2(-3.175,-2.819) 3(-1.905,-2.819) 4(-0.635,-2.819) 5(0.635,-2.819) 6(1.905,-2.819) 7(3.175,-2.819) 8(4.445,-2.819) 9(4.445,2.794) 10(3.175,2.794) 11(1.905,2.794) 12(0.635,2.794) 13(-0.635,2.794) 14(-1.905,2.794) 15(-3.175,2.794) 16(-4.445,2.794)
SOP8
  rect 1.5x0.75 smd: 1(-2.925,1.905) 2(-2.925,0.635) 3(-2.925,-0.635) 4(-2.925,-1.905) 5(2.925,-1.905) 6(2.925,-0.635) 7(2.925,0.635) 8(2.925,1.905)
SOT23-CHIPSEE
  rect 0.8x0.45 smd: 1(-1.25,0.95) 2(-1.25,-0.95) 3(1.25,0)
SW4-PUSH-CHIPSEE
  round 1.651 hole 1.092: 1(0.991,2.997) 2(0,0) 3(5.512,2.997) 4(6.502,0)
SWITCH-CHIPSEE
  rect 1.4x0.8 smd: (-1.6,-1.15) (-1.6,-3.45) (6.1,-1.15) (6.1,-3.45)
  round 0.5 hole 1 unplated: (0.75,-2.3) (3.75,-2.3)
  rect 0.75x1.5 smd: 1(0,0) 2(3,0) 3(4.5,0)
TP_SMD1MMCIRCLE
  round 1.016 smd: 1(0,0)
TPS61165
  rect 0.75x0.3 smd: 1(0,0) 2(0,-0.65) 3(0,-1.3) 4(2.2,-1.3) 5(2.2,-0.65) 6(2.2,0)
  rect 0.8x1.4 smd: 7(1.1,-0.65)
U_6_DRY
  rect 0.305x0.508 smd: 1(-0.5,-0.439) 2(0,-0.439) 3(0.5,-0.439) 4(0.5,0.439) 5(0,0.439) 6(-0.5,0.439)
U_16_D
  rect 0.599x1.999 smd: 1(-4.445,-2.4) 2(-3.175,-2.4) 3(-1.905,-2.4) 4(-0.635,-2.4) 5(0.635,-2.4) 6(1.905,-2.4) 7(3.175,-2.4) 8(4.445,-2.4) 9(4.445,2.4) 10(3.175,2.4) 11(1.905,2.4) 12(0.635,2.4) 13(-0.635,2.4) 14(-1.905,2.4) 15(-3.175,2.4) 16(-4.445,2.4)
U_16_PW
  rect 0.35x1.6 smd: 1(-2.275,-2.8) 2(-1.625,-2.8) 3(-0.975,-2.8) 4(-0.325,-2.8) 5(0.325,-2.8) 6(0.975,-2.8) 7(1.625,-2.8) 8(2.275,-2.8) 9(2.275,2.8) 10(1.625,2.8) 11(0.975,2.8) 12(0.325,2.8) 13(-0.325,2.8) 14(-0.975,2.8) 15(-1.625,2.8) 16(-2.275,2.8)
USB-MINI-SMT-CHIPSEE
  round 0.5 hole 1.2 unplated: (-2.032,-3.048) (2.032,-3.048)
  rect 0.508x2.261 smd: 1(-1.6,0) 2(-0.8,0) 3(0,0) 4(0.8,0) 5(1.6,0)
  rect 2.057x2.997 smd: 6(-4.572,-0.508) 7(4.572,-0.508) 8(-4.572,-6.096) 9(4.572,-6.096)
USB_STACKED2
  round 1.651 hole 1.016: A1(0,0) A2(2.499,0) A3(4.501,0) A4(7,0) B1(0,-2.616) B2(2.499,-2.616) B3(4.501,-2.616) B4(7,-2.616)
  round 3.048 hole 2.286: MH1(-3.071,0.363) MH2(10.071,0.363) MH3(-3.071,-5.326) MH4(10.071,-5.326)
VQFN48_RGZ
  rect 0.851x0.279 smd: 1(-3.475,2.75) 2(-3.475,2.25) 3(-3.475,1.75) 4(-3.475,1.25) 5(-3.475,0.75) 6(-3.475,0.25) 7(-3.475,-0.25) 8(-3.475,-0.75) 9(-3.475,-1.25) 10(-3.475,-1.75) 11(-3.475,-2.25) 12(-3.475,-2.75) 25(3.475,-2.75) 26(3.475,-2.25) 27(3.475,-1.75) 28(3.475,-1.25) 29(3.475,-0.75) 30(3.475,-0.25) 31(3.475,0.25) 32(3.475,0.75) 33(3.475,1.25) 34(3.475,1.75) 35(3.475,2.25) 36(3.475,2.75)
  rect 0.279x0.851 smd: 13(-2.75,-3.475) 14(-2.25,-3.475) 15(-1.75,-3.475) 16(-1.25,-3.475) 17(-0.75,-3.475) 18(-0.25,-3.475) 19(0.25,-3.475) 20(0.75,-3.475) 21(1.25,-3.475) 22(1.75,-3.475) 23(2.25,-3.475) 24(2.75,-3.475) 37(2.75,3.475) 38(2.25,3.475) 39(1.75,3.475) 40(1.25,3.475) 41(0.75,3.475) 42(0.25,3.475) 43(-0.25,3.475) 44(-0.75,3.475) 45(-1.25,3.475) 46(-1.75,3.475) 47(-2.25,3.475) 48(-2.75,3.475)
  rect 5.151x5.151 smd: TPAD(0,0)
WG7310_00
  round 0.375 smd: A1(-4.25,4.25) A2(-3.4,4.25) A3(-2.55,4.25) A4(-1.7,4.25) A5(-0.85,4.25) A6(0,4.25) A7(0.85,4.25) A8(1.7,4.25) A9(2.55,4.25) A10(3.4,4.25) A11(4.25,4.25) B1(-4.25,3.4) B2(-3.4,3.4) B3(-2.55,3.4) B4(-1.7,3.4) B5(-0.85,3.4) B6(0,3.4) B7(0.85,3.4) B8(1.7,3.4) B9(2.55,3.4) B10(3.4,3.4) B11(4.25,3.4) C1(-4.25,2.55) C2(-3.4,2.55) C10(3.4,2.55) C11(4.25,2.55) D1(-4.25,1.7) D2(-3.4,1.7) D4(-1.7,1.7) D5(-0.85,1.7) D6(0,1.7) D7(0.85,1.7) D8(1.7,1.7) D10(3.4,1.7) D11(4.25,1.7) E1(-4.25,0.85) E2(-3.4,0.85) E4(-1.7,0.85) E5(-0.85,0.85) E6(0,0.85) E7(0.85,0.85) E8(1.7,0.85) E10(3.4,0.85) E11(4.25,0.85) F1(-4.25,0) F2(-3.4,0) F4(-1.7,0) F5(-0.85,0) F7(0.85,0) F8(1.7,0) F10(3.4,0) F11(4.25,0) G1(-4.25,-0.85) G2(-3.4,-0.85) G4(-1.7,-0.85) G5(-0.85,-0.85) G6(0,-0.85) G7(0.85,-0.85) G8(1.7,-0.85) G10(3.4,-0.85) G11(4.25,-0.85) H1(-4.25,-1.7) H2(-3.4,-1.7) H4(-1.7,-1.7) H5(-0.85,-1.7) H6(0,-1.7) H7(0.85,-1.7) H8(1.7,-1.7) H10(3.4,-1.7) H11(4.25,-1.7) J1(-4.25,-2.55) J2(-3.4,-2.55) J10(3.4,-2.55) J11(4.25,-2.55) K1(-4.25,-3.4) K2(-3.4,-3.4) K3(-2.55,-3.4) K4(-1.7,-3.4) K5(-0.85,-3.4) K6(0,-3.4) K7(0.85,-3.4) K8(1.7,-3.4) K9(2.55,-3.4) K10(3.4,-3.4) K11(4.25,-3.4) L1(-4.25,-4.25) L2(-3.4,-4.25) L3(-2.55,-4.25) L4(-1.7,-4.25) L5(-0.85,-4.25) L6(0,-4.25) L7(0.85,-4.25) L8(1.7,-4.25) L9(2.55,-4.25) L10(3.4,-4.25) L11(4.25,-4.25)
Y3512
  rect 1.8x1.8 smd: 1(0,0) 2(3,0)

## Nets
AGND_AUD: C46.2 C47.2 C51.2 C52.2 C53.2 C54.2 C55.2 C56.2 C57.2 FB7.1 P14.1(P1) P15.1(P1) U5.15(AVSS_ADC) U5.20(DRVSS#20) U5.21(DRVSS#21) U5.26(AVSS_DAC) U5.TPAD U6.2(GND) U6.5(A4)
AGND_USB1: C72.2 C73.2 C74.2 C75.2 C76.2 C77.2 FB10.2 P16.A4(GNDA) P16.B4(GNDB) P17.A4(GNDA) P17.B4(GNDB) R149.2 U7.2(AGND#2) U7.8(AGND#8) U7.13(AGND#13) U7.17(AGND#17) U7.21(AGND#21)
AVDD: C19.2 D1.2(K) P8.43(AVDD) Q2.1 R64.1 R78.2 U2.11(SUPN) U2.13(SUPP)
DGND: BT1.2(NEG) C1.2 C2.2 C3.2(P2) C4.2 C5.2 C6.2 C7.2 C8.2 C9.2 C10.2 C11.2 C12.2 C13.2 C14.2 C15.2 C16.2 C17.2 C18.1 C19.1 C20.1 C21.1 C24.2 C25.1 C28.2 C29.2 C30.2 C31.2 C32.2 C33.2 C37.2 C38.2(P2) C39.2(P2) C58.2 C59.2 C60.2 C61.2 C62.1 C63.1 C64.2(M) C65.2(M) C66.2(M) C67.2(M) C68.2 C69.2 C70.2 C71.2 C78.2 C79.2 C80.2 C81.2 C82.2 C83.2 C84.2 C86.2 C87.2 C88.2 C90.1 C115.2 C120.2 C123.1 C124.1 C125.2 C142.2 C143.2 C144.2 C159.2 C163.2 C166.2(NEG) C169.2 C170.2 C171.2 C172.2 C173.2 C174.2 C175.2 C176.2 D17.2(ANODE) FB3.2 FB7.2 FB10.1 FB18.1 MTG1.1(TP) MTG2.1(TP) MTG3.1(TP) MTG4.1(TP) P2.1(21) P2.2(1) P3.39(40) P3.40(20) P4.21(31) P4.23(32) P4.24(12) P4.25(33) P4.26(13) P4.27(34) P4.28(14) P4.29(35) P4.30(15) P4.31(36) P4.32(16) P4.33(37) P4.34(17) P4.35(38) P4.36(18) P4.37(39) P4.38(19) P4.39(40) P4.40(20) P5.6(VSS) P6.4 P6.8 P6.10 P6.12 P7.8(GND) P8.5(GND#5) P8.8(MODE) P8.17(B2) P8.18(B1) P8.19(B0) P8.26(G1) P8.27(G0) P8.33(R2) P8.34(R1) P8.35(R0) P8.36(GND#36) P8.38(GND#38) P8.40(U/D) P8.48(GND#48) P18.5(GND) P19.5 P19.10 P19.11 P20.1 P23.16 P27.2 P27.3 Q1.2 Q5.3(SOURCE) Q7.3(SOURCE) Q8.3(SOURCE) Q9.3(SOURCE) Q10.3(SOURCE) Q12.3(SOURCE) Q13.3(SOURCE) R4.2 R5.2 R6.2 R14.1(P1) R18.1(P1) R19.1(P1) R20.1(P1) R33.1 R37.1 R39.1 R46.2 R47.2 R49.2 R57.2 R58.2 R59.2 R60.2 R61.2 R62.2 R63.2 R66.1 R76.2 R82.1 R84.2 R85.2 R86.1 R91.1 R111.2 R113.2 R114.2 R115.2 R116.2 R117.2 R118.2 R119.2 R120.2 R121.2 R122.2 R123.2 R124.2 R135.2 R136.1 R137.1 R138.1 R139.1 R140.1 R141.1 R143.1 R144.1 R145.1 R160.1 R197.2(P2) R203.1 R204.2 R205.2 R213.1 R214.1 R225.1(P1) SW2.1 SW2.2 SW2.4 SW3.1 SW3.2 SW3.4 SW4.1 SW4.2 SW4.4 SW5.1 SW5.2 SW5.4 SW6.1 SW6.2 SW6.4 U1.33(GND_EP) U2.5(GND) U2.14(PGND) U2.16(TGND) U3.3(GND) U3.7(PAD) U5.42(DVSS) U5.43(SELECT) U7.26(DGND#26) U7.33(DGND#33) U7.38(DGND#38) U7.43(DGND#43) U7.47(DGND#47) U8.1(GND#1) U8.5(GND#5) U9.4(GND) U10.15(GND) U11.1(A0) U11.2(A1) U11.3(A2) U11.4(VSS) U16.3(2DIR) U16.8(GND#8) U16.9(GND#9) U16.14(2O\E\) U16.15(1O\E\) U17.9(GND#9) U17.11(GND#11) U19.2(GND#2) U19.4(GND#4) U19.5(GND#5) U29.1(GND) U30.1(GND) U31.4(VSS) Y2.2(GND)
GND_EARTH: P5.10(GND1) P5.11(GND2) P5.12(GND4) P5.13(GND5) P7.13(SHD1) P7.14(SHD2) P18.6(GND#6) P18.7(GND#7) P18.8(GND#8) P18.9(GND#9) R39.2
V3_3AUD: C46.1 C47.1 C54.1 C55.1 C56.1 C57.1 FB8.2 U5.16(DRVDD#16) U5.17(DRVDD#17) U5.24(DRVDD#24) U5.25(AVDD_DAC)
VBAT: FB14.2 P1.1(21) P1.2(1) R89.1 R159.1
VBUS1: C67.1(P) C71.1 P16.A1(VBUSA) U8.15(OUT1)
VBUS2: C66.1(P) C70.1 P16.B1(VBUSB) U8.14(OUT2)
VBUS3: C65.1(P) C69.1 P17.A1(VBUSA) U8.11(OUT3)
VBUS4: C64.1(P) C68.1 P17.B1(VBUSB) U8.10(OUT4)
VDD_1V8: C60.1 C61.1 C170.1 C171.1 C174.1 FB13.1 R229.1 U5.36(DVDD) U16.16(VCCB) U29.2(VOUT)
VDD_1V8_B: C153.1 FB13.2 U25.A4(VIO) U25.H8(CLK_REQ_OUT)
VDD_3V3: C1.1 C2.1 C3.1(P1) C7.1 C8.1 C37.1 C58.1 C59.1 C78.1 C79.1 C80.1 C81.1 C83.1 C84.1 C115.1 C125.1 C159.1 C169.1 C175.1 C176.1 D20.1(A) FB1.1 FB2.2 FB8.1 FB9.1 FB11.2 FB12.1 FB17.1 P5.4(VDD) P6.5 P8.7(DVDD) P23.15 R1.1 R3.1 R7.1 R8.1 R9.1 R10.1 R11.1 R12.1 R15.1(P1) R16.1(P1) R17.2 R21.1(P1) R22.1(P1) R27.1 R48.1 R50.1 R51.2 R52.2 R53.2 R54.2 R55.2 R56.2 R77.1 R80.1 R81.1 R87.2 R102.2 R103.1 R104.1 R105.1 R106.1 R107.1 R108.1 R109.1 R110.1 R125.2(P2) R142.1 R146.1 R150.2 R152.2 R154.2 R156.2 R192.1(P1) R194.2(P2) R207.1 R208.1 R209.1 R220.2(P2) R221.2(P2) R222.1(P1) R223.1(P1) R224.1 U1.12(VDDIO) U5.44(IOVDD) U5.45(MFP0) U5.46(MFP1) U7.27(DVDD#27) U7.34(DVDD#34) U7.39(DVDD#39) U7.44(DVDD#44) U7.48(DVDD#48) U10.16(VCC) U11.8(VCC) U16.1(VCCA) U16.2(1DIR) U17.2(AVDD) U19.1(VDDIO) U30.2(VOUT) Y2.4(VCC)
VDD_3V3C: U17.14(VREN)
VDD_5V0: C21.2 C31.1 C166.1(POS) C172.1 C173.1 F1.2 FB14.1 L1.1 L2.1 R2.1 R65.1 R68.2 R83.2 R90.1 R199.1 R200.1 R201.1 R219.2(P2) U2.4(IN) U3.6(VIN) U8.2(IN1) U8.6(IN2) U29.3(VIN) U30.3(VIN)
VDD_PHYA: C4.1 C5.1 C6.1 FB1.2 R23.2 R24.2 R25.2 R26.2 R41.2 U1.1(VDD2A) U1.27(VDD1A)
AIN0: P3.23(32) P9.4
AIN1: P3.24(12) P9.2
AIN2: P3.25(33) P9.1
AIN3: P3.26(13) P9.3
AIN4: P3.27(34)
AIN5: P3.28(14)
AIN6: P3.29(35)
AIN7: P3.30(15)
AUD_HPLOUT: C45.1 U5.18(HPLOUT)
AUD_HPLOUT_JCK: C45.2 P14.2(P2) U6.6(A5)
AUD_HPROUT: C44.1 U5.23(HPROUT)
AUD_HPROUT_JCK: C44.2 P14.4(P3) U6.4(A3)
AUD_MCLK: R126.1(P1) R128.1(P1) U5.37(MCLK)
AUD_RESETN: R127.1(P1) U5.33(RESETN)
BT_CTS: U16.12(1B2) U25.D6(HCI_CTS/ BTSPI_CS)
BT_RTS: U16.10(2B2) U25.D7(HCI_RTS/ BTSPI_IRQ)
BT_RX: U16.13(1B1) U25.F8(HCI_RX/ BTSPI_DIN)
BT_TX: U16.11(2B1) U25.E8(HCI_TX/ BTSPI_DOUT)
CAP_INT: P11.4
CAP_RES: P11.2 R87.1 R88.2
COL/CRS_DV/MODE2: R40.2 R51.1 R58.1 U1.15(COL/CRS_DV/MODE2)
CRS_DV/MODE2: R42.2 U1.14(CRS)
DRVN: C22.1 C26.1 U2.10(DRVN)
DRVP: C23.2 C27.2 U2.12(DRVP)
ECAP0_IN_PWM0_OUT: P1.17(29) P23.14
EMU0: P3.35(38) P6.13 R20.2(P2) R22.2(P2)
EMU1: P3.37(39) P6.14 R19.2(P2) R21.2(P2)
ESD_RING: P16.MH1(SHELD1) P16.MH2(SHIELD2) P16.MH3(SHIELD3) P16.MH4(SHIELD4) P17.MH1(SHELD1) P17.MH2(SHIELD2) P17.MH3(SHIELD3) P17.MH4(SHIELD4) R135.1
EXP_PB_POWERON: C163.1 P1.18(9) Q13.2(DRAIN) R2.2 R5.1 SW5.3
EXT_WAKEUP: P1.20(10) R1.2 R4.1
FBN: R73.1 R75.2 U2.8(FBN)
FBP: R74.1 R76.1 U2.7(FBP)
GMII1_COL: P2.30(15) R40.1
GMII1_CRS: P2.32(16) R42.1
GMII1_MDIO_CLK: P2.20(10) U1.17(MDC)
GMII1_MDIO_DATA: P2.18(9) R27.2 U1.16(MDIO)
GMII1_REFCLK: P2.29(35) R28.1 R43.1
GMII1_RXCLK: P2.23(32) R35.1
GMII1_RXD0: P2.14(7) R32.1
GMII1_RXD1: P2.15(28) R31.1
GMII1_RXD2: P2.17(29) R30.1
GMII1_RXD3: P2.19(30) R29.1
GMII1_RXDV: P2.25(33) R34.1
GMII1_RXERR: P2.27(34) R36.1
GMII1_TXCLK: P2.24(12) R38.1
GMII1_TXD0: P2.22(11) U1.22(TXD0)
GMII1_TXD1: P2.21(31) U1.23(TXD1)
GMII1_TXD2: P2.16(8) U1.24(TXD2)
GMII1_TXD3: P2.26(13) U1.25(TXD3)
GMII1_TXEN: P2.28(14) U1.21(TXEN)
GPMC_A0: P1.16(8) P23.13
GPMC_A1: P1.15(28) P23.12
GPMC_A2: P1.14(7) P23.11
GPMC_A3: P1.13(27) P23.10
GPMC_A4: P1.12(26) P23.9
GPMC_A5: P1.11(6) P23.8
GPMC_A6: P1.10(5) P23.7
GPMC_A7: P1.9(25) P23.6
GPMC_A8: P1.8(4) P23.5
GPMC_A9: P1.7(24) P23.4
GPMC_A10: P1.6(3) P23.3
GPMC_A11: P1.5(23) P23.2
GPMC_AD8: C144.1 P1.24(12) R209.2 R229.2 SW4.3
GPMC_AD9: P1.32(16) R213.2 U25.L11(WL_EN)
GPMC_AD10: P1.27(34) U25.G8(WLAN_IRQ)
GPMC_AD11: P1.30(15) R214.2 U25.K4(BT_EN)
GPMC_AD12: P1.31(36) U25.K9(SPI_DOUT/ SDIO_D0)
GPMC_AD13: P1.33(37) U25.L7(SDIO_D1)
GPMC_AD14: P1.28(14) U25.L8(SDIO_D2)
GPMC_AD15: P1.26(13) U25.K8(SPI_CSX/ SDIO_D3)
GPMC_ADVN_ALE: P1.34(17)
GPMC_BE0N_CLE: P1.36(18)
GPMC_BEN1: P1.4(2) P23.1
GPMC_CLK: P1.29(35) U25.L10(SPI_CLK/ SDIO_CLK)
GPMC_CSN0: P1.39(40)
GPMC_CSN1: C142.1 P1.21(31) R207.2 SW2.3
GPMC_CSN2: C143.1 P1.23(32) R208.2 SW3.3
GPMC_CSN3: P1.25(33) U25.L9(SPI_DIN/ SDIO_CMD)
GPMC_OEN_REN: P1.35(38)
GPMC_WAIT: P1.37(39)
GPMC_WEN: P1.38(19)
GPMC_WPN: P1.40(20)
GRN_C: P7.9(GRNA) R37.2
GRNA: P7.10(GRNC) R47.1 U1.3(LED1/REGOFF)
HMC5883_C1: C120.1 R192.2(P2) U17.10(C1) U17.13(DVDD)
I2C0_SCL: P3.5(23) P11.3 U5.1(SCL) U17.1(SCL) U19.14(SCL) U31.6(SCL)
I2C0_SDA: P3.3(22) P11.5 U5.2(SDA) U17.16(SDA) U19.13(SDA) U31.5(SDA)
LCD_B3: P8.16(B3) RN1.13(R4B)
LCD_B4: P8.15(B4) RN1.12(R5B)
LCD_B5: P8.14(B5) RN1.11(R6B)
LCD_B6: P8.13(B6) RN1.10(R7B)
LCD_B7: P8.12(B7) RN1.9(R8B)
LCD_DATA0: P4.10(5) R103.2 RN1.4(R4A)
LCD_DATA1: P4.7(24) R104.2 RN1.5(R5A)
LCD_DATA2: P4.8(4) RN1.6(R6A) SW1.2(COMMON)
LCD_DATA3: P4.5(23) R113.1 RN1.7(R7A)
LCD_DATA4: P4.6(3) R105.2 RN1.8(R8A)
LCD_DATA5: P4.16(8) R106.2 R114.1 RN2.6(R6A)
LCD_DATA6: P4.13(27) R115.1 RN2.7(R7A)
LCD_DATA7: P4.14(7) R116.1 RN2.8(R8A)
LCD_DATA8: P4.11(6) R107.2 R117.1 RN1.1(R1A)
LCD_DATA9: P4.12(26) R108.2 R118.1 RN1.2(R2A)
LCD_DATA10: P4.9(25) R119.1 RN1.3(R3A)
LCD_DATA11: P4.19(30) R120.1 RN2.1(R1A)
LCD_DATA12: P4.20(10) R121.1 RN2.2(R2A)
LCD_DATA13: P4.17(29) R122.1 RN2.3(R3A)
LCD_DATA14: P4.18(9) R109.2 R123.1 RN2.4(R4A)
LCD_DATA15: P4.15(28) R110.2 R124.1 RN2.5(R5A)
LCD_DCLK: P8.37(DCLK) R72.1
LCD_EN: P8.9(DE) R69.1
LCD_EN1: P4.2(1) R69.2
LCD_G2: P8.25(G2) RN2.11(R6B)
LCD_G3: P8.24(G3) RN2.10(R7B)
LCD_G4: P8.23(G4) RN2.9(R8B)
LCD_G5: P8.22(G5) RN1.16(R1B)
LCD_G6: P8.21(G6) RN1.15(R2B)
LCD_G7: P8.20(G7) RN1.14(R3B)
LCD_HS: P8.11(HS) R71.1
LCD_HSYNC: P4.3(22) R71.2
LCD_PCLK: P4.22(11) R72.2
LCD_R3: P8.32(R3) RN2.16(R1B)
LCD_R4: P8.31(R4) RN2.15(R2B)
LCD_R5: P8.30(R5) RN2.14(R3B)
LCD_R6: P8.29(R6) RN2.13(R4B)
LCD_R7: P8.28(R7) RN2.12(R5B)
LCD_VS: P8.10(VS) R70.1
LCD_VSYNC: P4.4(2) R70.2
LED2: P7.12(YELA) U1.2(LED2/NINTSEL)
LED+: C32.1 D2.2(K) P8.1(VLED+#1) P8.2(VLED+#2)
LED-: P8.3(VLED-#3) P8.4(VLED-#4) R84.1 R85.1 U3.1(FB)
MCASP0_ACLKR: P3.16(8) U17.15(DRY)
MCASP0_ACLKX: P3.17(29) U5.38(BCLK)
MCASP0_AHCLKR: P3.21(31) Q5.1(GATE) R86.2
MCASP0_AHCLKX: P3.15(28) R128.2(P2) R202.1
MCASP0_AXR0: P3.22(11) U5.40(DIN)
MCASP0_AXR1: P3.19(30) U5.41(DOUT)
MCASP0_FSR: P3.18(9) U19.8(INT1)
MCASP0_FSX: P3.20(10) U5.39(WCLK)
MD_SLOWCLK: R217.1 R218.2 U25.F10(SLOWCLK)
MMC0_CLK: P2.33(37) P5.5(CLOCK) R9.2
MMC0_CMD: P2.31(36) P5.3(CMD) R8.2
MMC0_D0: P2.36(18) P5.7(DAT0) R10.2
MMC0_D1: P2.34(17) P5.8(DAT1) R11.2
MMC0_D2: P2.35(38) P5.1(DAT2) R7.2
MMC0_D3: P2.37(39) P5.2(CD/DAT3) R12.2
MMC0_SDCD: P2.38(19) R13.1
NINT/RXCLK/PHYAD1: R56.1 R63.1
NMIN: P2.13(27) R3.2 R6.1
PHY_VDDCR: C9.1 C10.1 U1.6(VDDCR)
PHY_XTAL1: C17.1 R44.2 R45.1 Y1.1
PHYX: C16.1 R44.1 U1.4(XTAL2) Y1.3
PMIC_GPIO: P1.22(11)
RBIAS: R49.1 U1.32(RBIAS)
RCLKIN: R43.2 R45.2 U1.5(XTAL1/CLKIN)
REF: C30.1 R75.1 U2.6(REF)
REFCLKO: R28.2 R35.2 U1.7(RXCLK/PHYAD1)
RS232_0_CTSN: P19.8 R186.1
RS232_0_RTSN: P19.7 R189.1
RS232_0_RXD: P19.2 U10.14(DOUT1)
RS232_0_TXD: P19.3 U10.13(RIN1)
RS232_4_RXD: P20.3 R190.1
RS232_4_TXD: P20.2 R187.1
RXD0/MODE0: R32.2 R53.1 R60.1 U1.11(RXD0/MODE0)
RXD1/MODE1: R31.2 R52.1 R59.1 U1.10(RXD1/MODE1)
RXD2/RMIISEL: R30.2 R54.1 R61.1 U1.9(RXD2/RMIISEL)
RXD3/PHYAD2: R29.2 R55.1 R62.1 U1.8(RXD3/PHYAD2)
RXDV: R34.2 U1.26(RXDV)
RXER/PHYAD0: R36.2 R50.2 R57.1 U1.13(RXER/RXD4/PHYAD0)
RXN: C12.1 P7.2(RD-) R24.1 U1.30(RXN)
RXP: C11.1 P7.1(RD+) R23.1 U1.31(RXP)
SD_CD: P5.9(CD) R13.2 R17.1
SPI0_CLK: P3.8(4)
SPI0_CS0: P3.10(5) R220.1(P1) U11.6(SCL)
SPI0_D0: P3.7(24)
SPI0_D1: P3.9(25) R221.1(P1) U11.5(SDA)
TCK: P3.31(36) P6.11 R18.2(P2)
TCT_RCT: C15.1 P7.4(RCT) P7.5(TCT) R41.1
TDI: P3.32(16) P6.3 R15.2(P2)
TDO: P3.33(37) P6.7
TMS: P3.34(17) P6.1 R16.2(P2)
TRSTN: P3.36(18) P6.2 R14.2(P2)
TXCLK: R38.2 U1.20(TXCLK)
TXN: C14.1 P7.6(TD-) R26.1 U1.28(TXN)
TXP: C13.1 P7.3(TD+) R25.1 U1.29(TXP)
UART0_CTSN: P2.40(20) U10.9(ROUT2)
UART0_RTSN: P2.39(40) U10.10(DIN2)
UART0_RXD: P3.2(1) U10.12(ROUT1)
UART0_TXD: P3.1(21) U10.11(DIN1)
UART1_CTSN: P3.4(2) U16.7(2A2)
UART1_RTSN: P3.6(3) U16.5(1A2)
UART1_RXD: P3.11(6) U16.6(2A1)
UART1_TXD: P3.12(26) U16.4(1A1)
USB0_DM: P2.11(6) P18.2(DM) U9.2(D-)
USB0_DP: P2.12(26) P18.3(DP) U9.1(D+)
USB0_DRVVBUS: P2.5(23)
USB0_ID: P2.8(4) P18.4(ID) U9.3(ID)
USB0_VBUS: P2.6(3) R158.2
USB1_DM: P2.9(25) U7.3(DM0)
USB1_DP: P2.10(5) U7.4(DP0)
USB1_DRVVBUS: P2.3(22)
USB1_ID: P2.7(24) R160.2
USB1_VBUS: P2.4(2) R159.2
USB_DM1: P16.A2(DA-) R136.2 U7.5(DM1)
USB_DM2: P16.B2(DB-) R138.2 U7.9(DM2)
USB_DM3: P17.A2(DA-) R140.2 U7.18(DM3)
USB_DM4: P17.B2(DB-) R143.2 U7.22(DM4)
USB_DP1: P16.A3(DA+) R137.2 U7.6(DP1)
USB_DP2: P16.B3(DB+) R139.2 U7.10(DP2)
USB_DP3: P17.A3(DA+) R141.2 U7.19(DP3)
USB_DP4: P17.B3(DB+) R144.2 U7.23(DP4)
VAUX33: P4.1(21)
VBCKUPBAT: P1.3(22) R89.2
VCOM: P8.6(VCOM#6) P8.46(VCOM#46) R78.1 R82.2
VGH: C29.1 P8.41(VGH) Q4.2 R74.2
VGL: C28.1 P8.42(VGL) Q3.1 R73.2
VMMC: C39.1(P1) P1.19(30) Q7.1(GATE) Q12.1(GATE) R91.2 R225.2(P2)
VUSB_VBUS0: C82.1 P18.1(VBUS) R158.1 U9.6(VBUS)
WARMRSTN: C38.1(P1) P3.38(19) R48.2 R79.1 R88.1 R127.2(P2) R148.2 SW6.3 U1.19(NRST)
WB_RF_ANT: C155.1 C156.2 L8.2
WIFI-GND: ANT1.1 ANT1.2 ANT1.3 ANT1.4 C152.2 C153.2 C154.2 FB18.2 L8.1 R218.1 U25.A1(GND1) U25.A6(GND23) U25.A8(GND21) U25.A10(GND19) U25.B2(GND2) U25.B7(GND22) U25.B9(GND20) U25.B11(GND18) U25.C10(GND17) U25.D2(GND3) U25.D11(GND16) U25.E1(GND4) U25.E6(GND32) U25.E7(GND31) U25.E10(GND15) U25.F2(GND5) U25.F4(GND24) U25.F5(GND26) U25.F7(GND30) U25.F11(GND14) U25.G1(GND6) U25.G5(GND27) U25.G6(GND28) U25.G7(GND29) U25.G10(GND13) U25.H2(GND7) U25.H4(GND25) U25.K1(GND8) U25.K5(GND11) U25.L2(GND9) U25.L3(FM_EN) U25.L4(GND10) U25.L6(GND12) Y4.2(GND)
XDMA_EVENT_INTR0: P3.13(27) Q8.1(GATE) R204.1
XDMA_EVENT_INTR1: P3.14(7) Q10.1(GATE) R203.2
YEL_C: P7.11(YELC) R33.2
N10222107: C49.1 U5.3(LINE1LP)
N10222247: C50.1 U5.5(LINE1RP)
N10222377: C48.1 U5.11(MIC3L) U5.14(MIC3R)
N10222455: R126.2(P2) Y2.3(CLK)
N10227247: R186.2 R187.2 U10.7(DOUT2)
N10227391: C87.1 U10.2(V+)
N10227399: C88.1 U10.6(V-)
N10227423: C89.2 U10.5(C2-)
N10227427: C89.1 U10.4(C2+)
N10227431: C85.2 U10.3(C1-)
N10227435: C85.1 U10.1(C1+)
N10395894: C72.1 C73.1 C74.1 C75.1 C76.1 C77.1 FB9.2 U7.1(AVDD#1) U7.7(AVDD#7) U7.12(AVDD#12) U7.16(AVDD#16) U7.20(AVDD#20)
N10396398: R148.1 U7.28(RESET#)
N10396411: R142.2 U7.41(OVCUR1#)
N10396453: R145.2 U7.40(PGANG)
N10396689: R146.2 U7.37(PSELF)
N10398307: C62.2 R147.1 U7.14(X1) Y3.1
N10398316: C63.2 R147.2 U7.15(X2) Y3.3
N10398959: R149.1 U7.11(RREF)
N10401156: R154.1 R155.1 U8.4(EN2)
N10401160: R151.2 U8.9(OC4)
N10401172: R153.2 U8.12(OC3)
N10401208: R152.1 R153.1 U8.7(EN3)
N10401226: R156.1 R157.1 U8.3(EN1)
N10401360: R150.1 R151.1 U8.8(EN4)
N10401548: R157.2 U8.16(OC1)
N10401576: R155.2 U8.13(OC2)
N10476612: R189.2 R190.2 U10.8(RIN2)
N10583274: Q9.2(DRAIN) U21.2
N10583468: R200.2 U21.1
N10583478: D14.2(A) R199.2
N10628253: Q9.1(GATE) R202.2 R205.1
N10876985: R65.2 U2.1(R\D\Y\)
N10877045: R64.2 R66.2 R67.2 U2.2(FB)
N10877089: C18.2 R67.1
N10877109: C20.2 U2.3(INTG)
N10877253: D1.1(A) L1.2 U2.15(LX)
N10877551: R68.1 U2.9(S\H\D\N\)
N10877617: C22.2 Q1.3
N10877679: C24.1 Q1.1 Q3.2
N10877829: C23.1 Q2.3
N10877859: C27.1 Q4.3
N10877887: C25.2 Q2.2 Q4.1
N10878107: D2.1(A) L2.2 U3.4(SW)
N10878241: C33.1 U3.2(COMP)
N10878303: Q5.2(DRAIN) R83.1 U3.5(CTR)
N10878877: P8.39(L/R) R77.2
N10879049: P8.44(RESET) R79.2 R81.2
N11142389: C48.2 R130.1(P1) R133.1(P1) R134.1(P1)
N11142564: C51.1 R132.1(P1) R133.2(P2)
N11142568: R132.2(P2) U5.13(MICBIAS)
N11143245: P15.4(P3) R129.2(P2) R130.2(P2) U6.3(A2)
N11143392: C49.2 R129.1(P1)
N11143396: C50.2 R131.1(P1)
N11143559: P15.2(P2) R131.2(P2) R134.2(P2) U6.1(A1)
N11143775: C52.1 U5.6(LINE1RM)
N11143782: C53.1 U5.4(LINE1LM)
N11595485: R125.1(P1) Y2.1(OEN)
N11852277: D16.2(K) D17.1(CATHODE) F1.1
N11852309: D16.1(A) P27.1
N12070163: R46.1 U1.18(NINT/TXER/TXD4)
N12085543: R194.1(P1) U19.7(C\S\)
N12085593: R197.1(P1) U19.12(SDO)
N12085649: C123.2 C124.2 FB11.1 U19.6(VS)
N12086133: C117.2 U17.12(SETC)
N12086141: C117.1 U17.8(SETP)
N12087779: C152.1 C154.1 FB12.2 U25.A3(VBAT) U25.B3(VDD_LDO_IN_CLASS1P5)
N12088247: U25.B5(TPS_DC2DC) U25.B6(BT_FUNC1- DC2DC/ BTSPI_CLK)
N12088537: TP6.1 U25.D5(PCM_AUD_FSYNC)
N12088561: TP3.1 U25.C2(BT_FUNC4-BT_TX_DBG)
N12088573: TP5.1 U25.E4(PCM_AUD_IN)
N12088667: FB17.2 R216.2 Y4.4(VCC)
N12088675: TP4.1 U25.D4(PCM_AUD_CLK)
N12088679: TP7.1 U25.E5(PCM_AUD_OUT)
N12088869: TP9.1 U25.B4(1V8)
N12088873: TP8.1 U25.A5(DC_REQ)
N12088887: C155.2 U25.L5(WB_RF_ANT)
N12088953: ANT1.5 C156.1
N12144989: C34.2 C35.2 C36.1 FB2.1 P11.1
N12145059: C34.1 C35.1 C36.2 FB3.1 P11.6
N12176376: P6.9
N12305990: R102.1 SW1.1(NC)
N12305994: R111.1 SW1.3(NO)
N12342632: R224.2 U11.7(WP)
N12347989: D15.1(C) Q10.2(DRAIN)
N12353090: C86.1 U31.2(OSCO) Y5.1
N12353108: C90.2 U31.1(OSCI) Y5.2
N12353176: D20.2(K) D21.2(K) U31.8(VDD)
N12353180: R223.2(P2) U31.3(I\N\T\)
N12354146: R222.2(P2) U31.7(CLKOUT)
N12365564: D18.2(ANODE) R219.1(P1)
N12366270: Q7.2(DRAIN) Q13.1(GATE) R90.2
N105829580: D14.1(C) Q8.2(DRAIN)
N108775692: C26.2 Q3.3
N108789451: P8.47(DITHB) R80.2
N120878550: R216.1 Y4.1(OEN)
N120878711: R217.2 Y4.3(CLK)
N123479671: D15.2(A) R201.2
N123535350: BT1.1(POS) D21.1(A)
N123655342: D18.1(CATHODE) Q12.2(DRAIN)

Pads without a net: P7 7; P8 45 49 50; P14 3 5; P15 3 5; P19 1 4 6 9; U5 7 8 9 10 12 19 22 27 28 29 30 31 32 34 35 47 48; U7 24 25 29 30 31 32 35 36 42 45 46; U9 5; U17 3 4 5 6 7; U19 3 9 10 11; U25 A2 A7 A9 A11 B1 B8 B10 C1 C11 D1 D8 D10 E2 E11 F1 G2 G4 G11 H1 H5 H6 H7 H10 H11 J1 J2 J10 J11 K2 K3 K6 K7 K10 K11 L1; Y1 2 4; Y3 2 4

## Via types
v1: diameter 0.508, hole 0.305, TOP to BOTTOM, 508 vias

## Routing (per net, layer and track width the routed paths; a pad name or vN(x,y) marks a point on that pad's centre or on a via; arc(x,y) is an arc through that point)
AGND_AUD: length 117.6
  TOP w0.203: v1(141.94,74.6) C57.2 C56.2 ; U5.20 144.33,69.86 ; 144.33,69.86 v1(145.08,69.11) ; 144.33,69.86 143.83,70.36 ; v1(145.08,69.11) 146.83,70.86 U5.15 ; v1(145.08,69.11) 145.77,71.48 v1(145.77,71.15) ; v1(145.08,69.11) v1(145.08,69.19) ; U5.21 143.83,70.36 ; 143.83,70.36 142.83,71.36 U5.26
  BOTTOM w0.203: 149.05,73.38 148.64,73.38 147.24,71.98 C52.2 145.75,69.82 145.08,69.16 ; 149.05,73.38 C51.2 ; 149.05,73.38 149.05,75.21 148.46,75.79 C55.2 145.8,75.79 C54.2 ; v1(141.94,74.6) 141.59,74.26 141.59,74.21 ; C46.2 142.09,71.02 141.91,70.84 C47.2 144.04,70.21 145.08,69.16 ; C46.2 142.09,73 141.24,73.85 ; C46.2 142.14,72.14 v1(145.08,69.19) ; C54.2 145.47,79.81 147.42,81.76 155.8,81.76 158.06,84.02 175.74,84.02 177.98,81.79 ; C54.2 143.51,76.12 141.59,74.21 ; 141.24,73.85 140.87,73.48 138.13,73.48 137.62,72.97 FB7.1 ; 141.24,73.85 141.59,74.21 ; U6.2 U6.5 173.06,78.39 176.45,81.79 177.98,81.79 ; 177.98,81.79 178.28,81.48 P14.1 178.28,73.05 178.26,73.03 P15.1 ; 145.08,69.16 146.08,68.17 C53.2
  vias: v1(144.27,67.59)
AGND_USB1: length 105.7
  TOP w0.203: U7.8 42.15,34.74 v1(42.37,34.52) ; v1(41.35,38.84) 41.01,38.5 41.01,38.44 40.8,38.24 U7.13 ; v1(37.92,39.52) 37.5,39.1 U7.17 37.5,37.33 v1(36.3,36.12) 35.5,36.91 U7.21 ; v1(41.88,27.08) 42.21,27.41 v1(42.21,31.52) 42,31.74 U7.2
  TOP w0.508: v1(27.79,38.84) 26.06,38.84 25.15,39.75 22.2,39.75 15.98,45.97 14.78,45.97 14.41,46.34 P17.A4 P17.B4
  BOTTOM w0.203: R149.2 43.18,34.52 v1(42.37,34.52) 42.37,31.67 v1(42.21,31.52) ; v1(37.92,39.52) 38.15,39.75 C76.2 38.68,40.39 39.12,40.82 40.79,40.82 41.01,40.6 41.01,39.18 v1(41.35,38.84)
  BOTTOM w0.508: v1(27.79,38.84) 32.91,38.84 34.66,37.08 C77.2 34.87,36.91 34.87,36.25 35,36.12 v1(36.3,36.12) 36.32,36.14 C75.2 C74.2 37.57,33.76 37.49,33.68 C73.2 37.52,31.7 37.52,30.96 38.51,29.97 38.96,29.97 41.86,27.08 ; 41.86,27.08 v1(41.88,27.08) C72.2 44.02,26.87 FB10.2 ; 41.86,27.08 35.48,27.08 34.52,26.11 31.12,26.11 30.53,26.7 19.05,26.7 17.19,28.56 P16.A4 P16.B4
